# Altium PCB Cold_chain_Logger.PcbDoc (part 1 of 3)
Units mm, origin at the board's own origin, x right, y up, seen from the top; angles counter-clockwise.
Board outline 66 x 99 mm, 4 copper layers (Top Layer, GND Layer, 3.3V layer, Bottom Layer), stack 1.586 mm thick; 118 components, 83 nets, 435 pads, 406 vias.
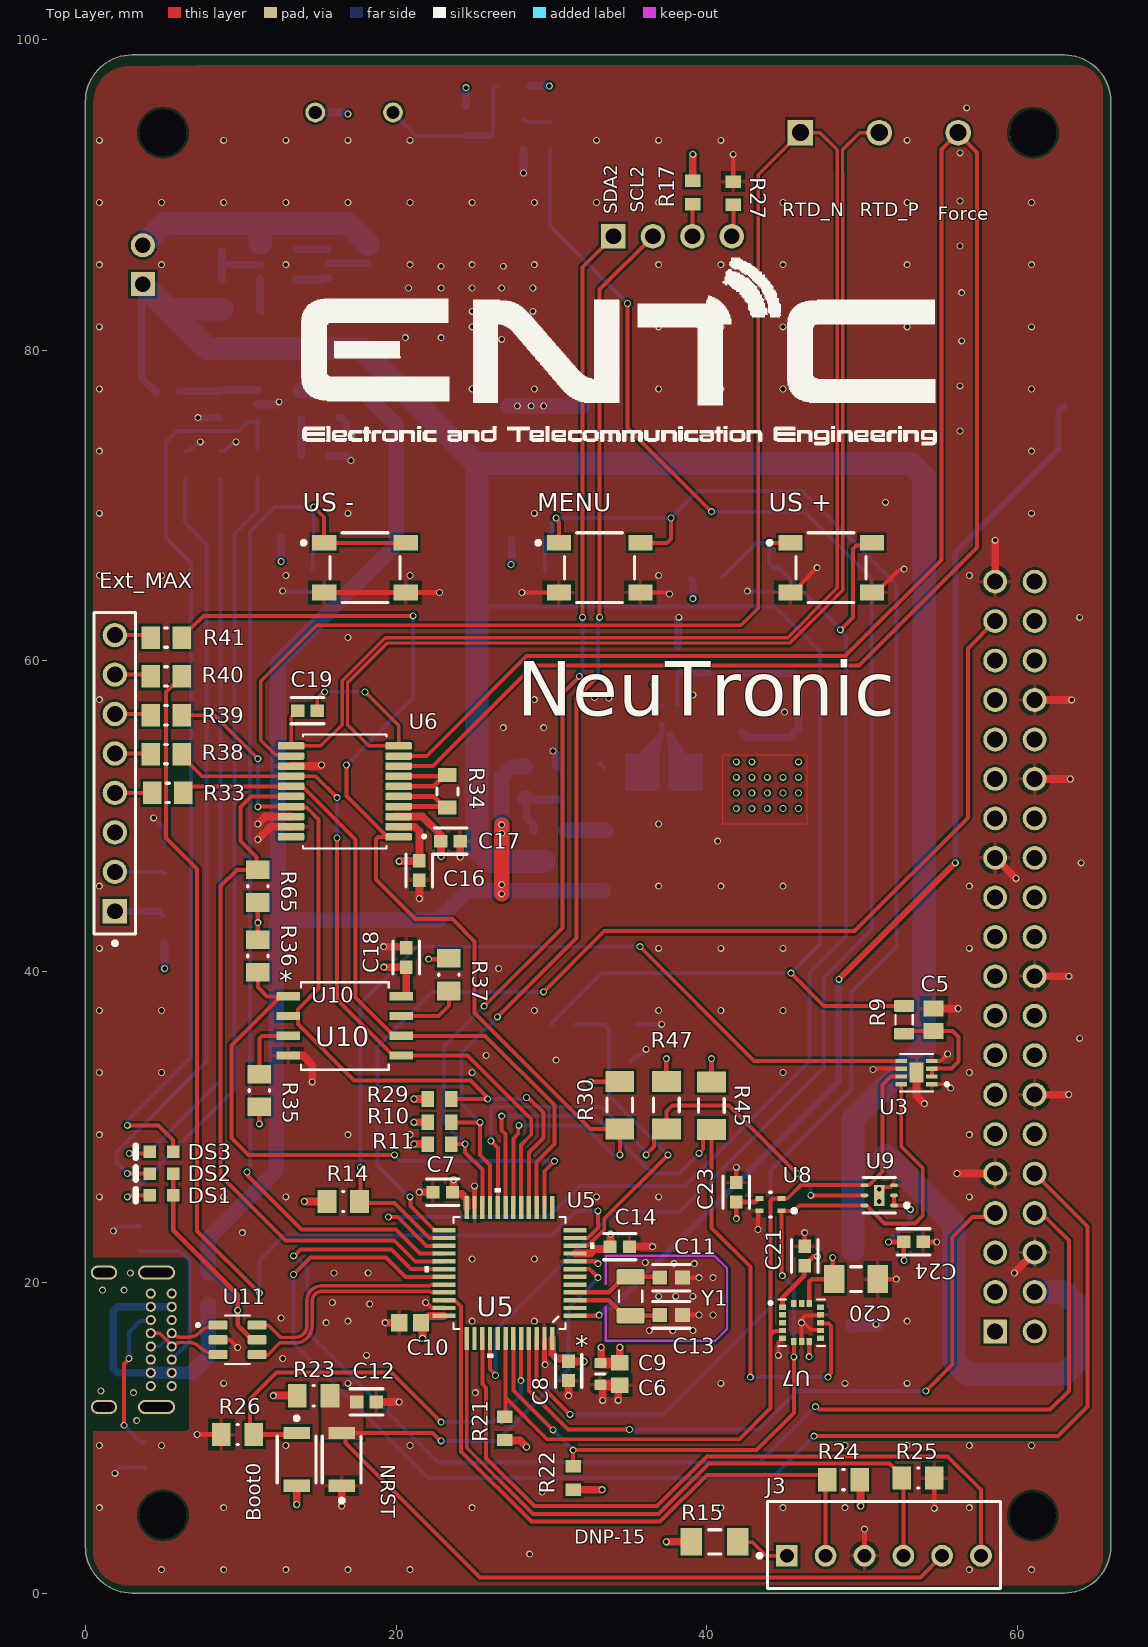
[diagram p0: Top Layer view]
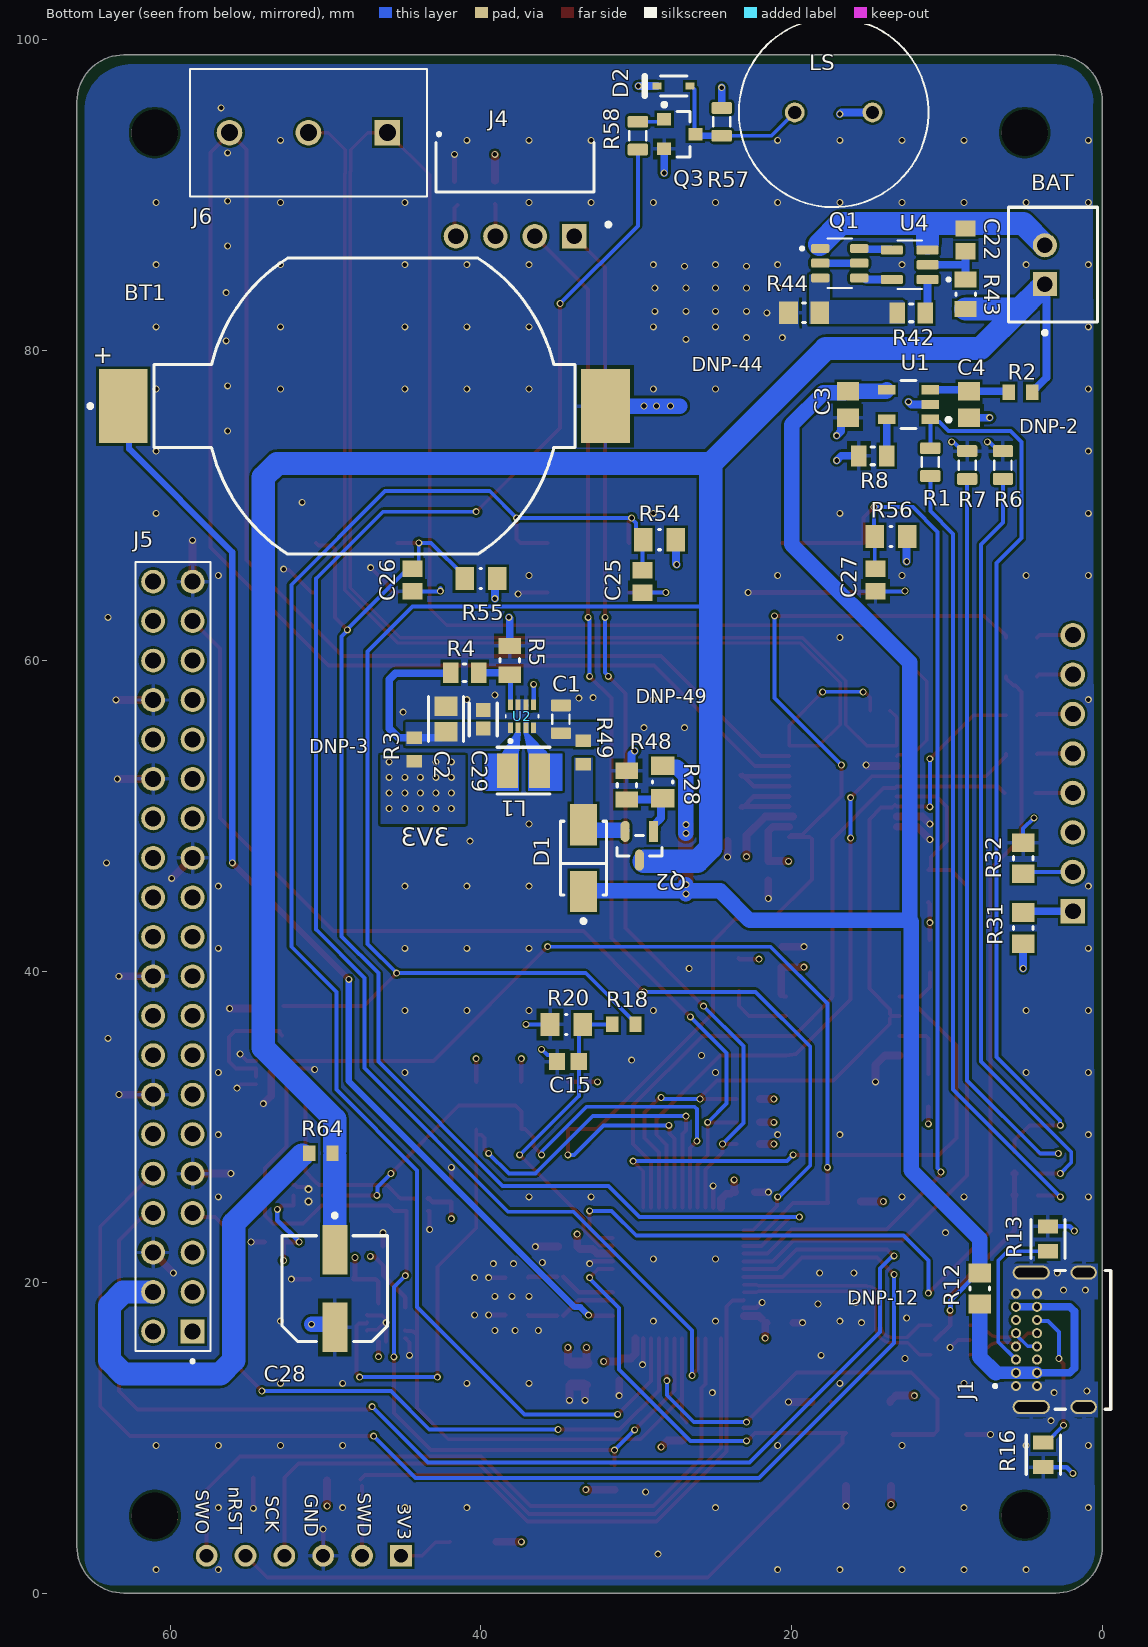
[diagram p1: Bottom Layer view, seen from below]
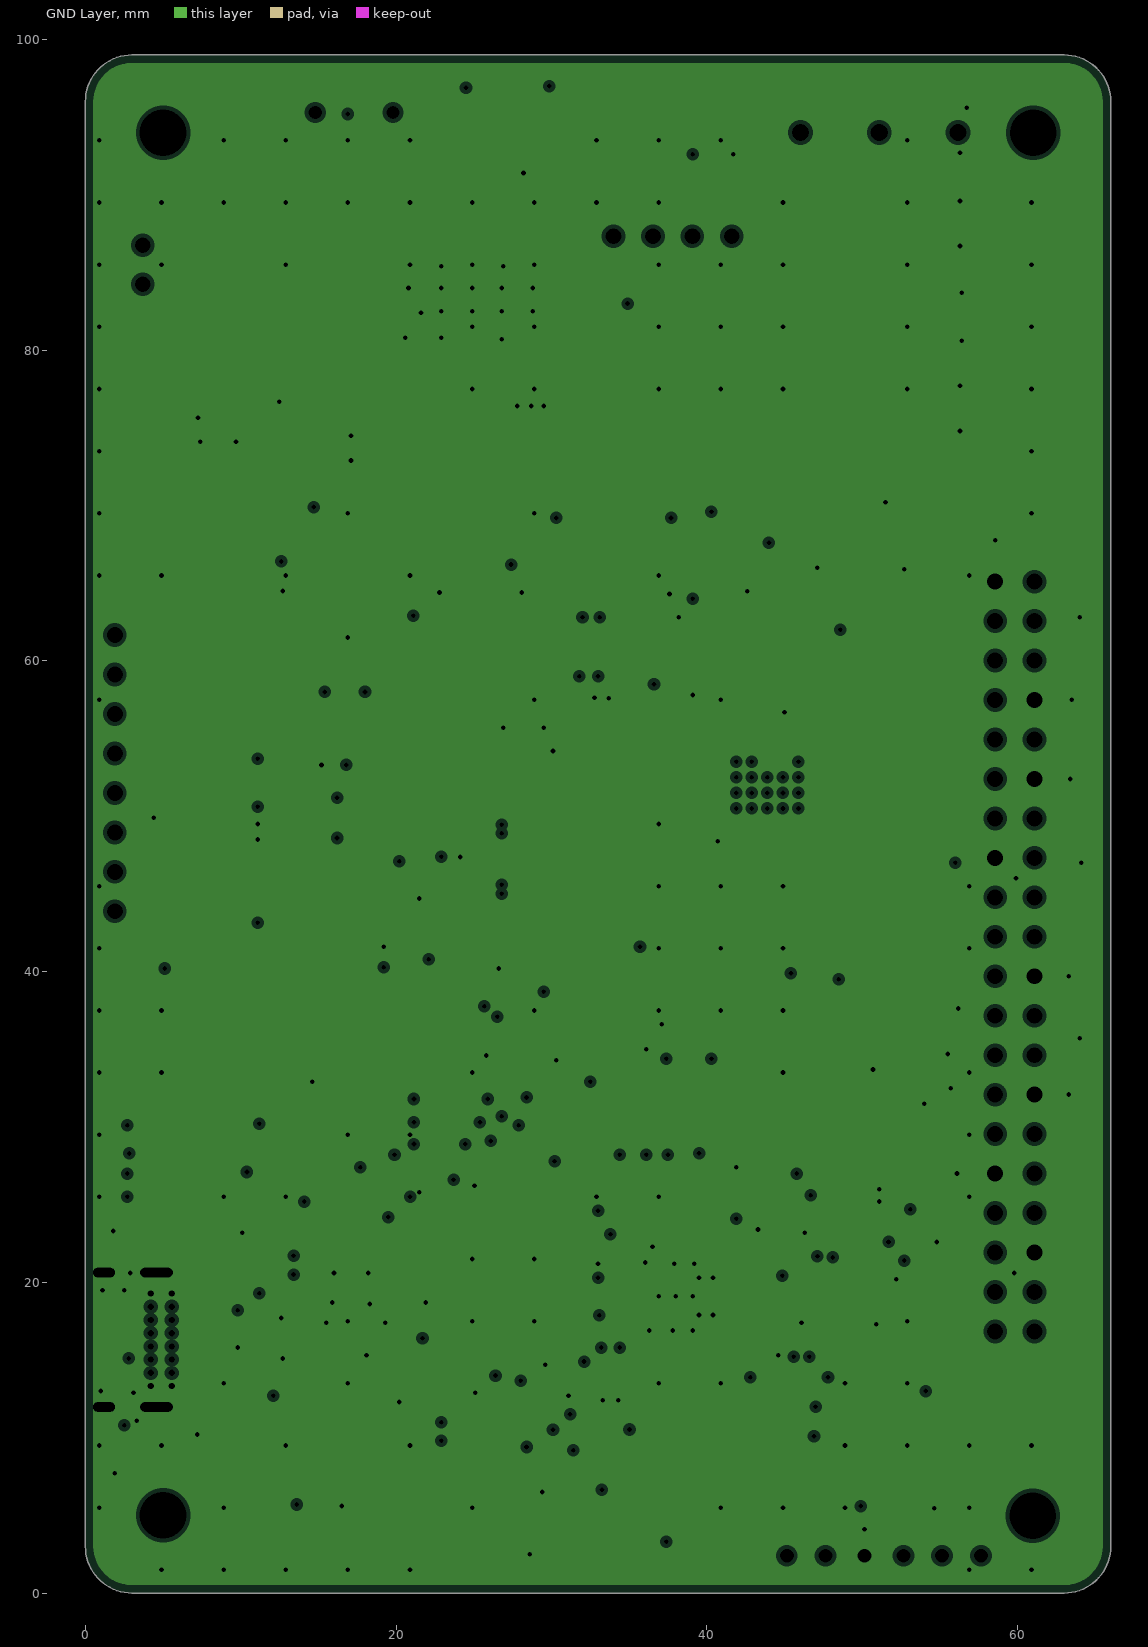
[diagram p2: GND Layer, clearances drawn from the general rule]
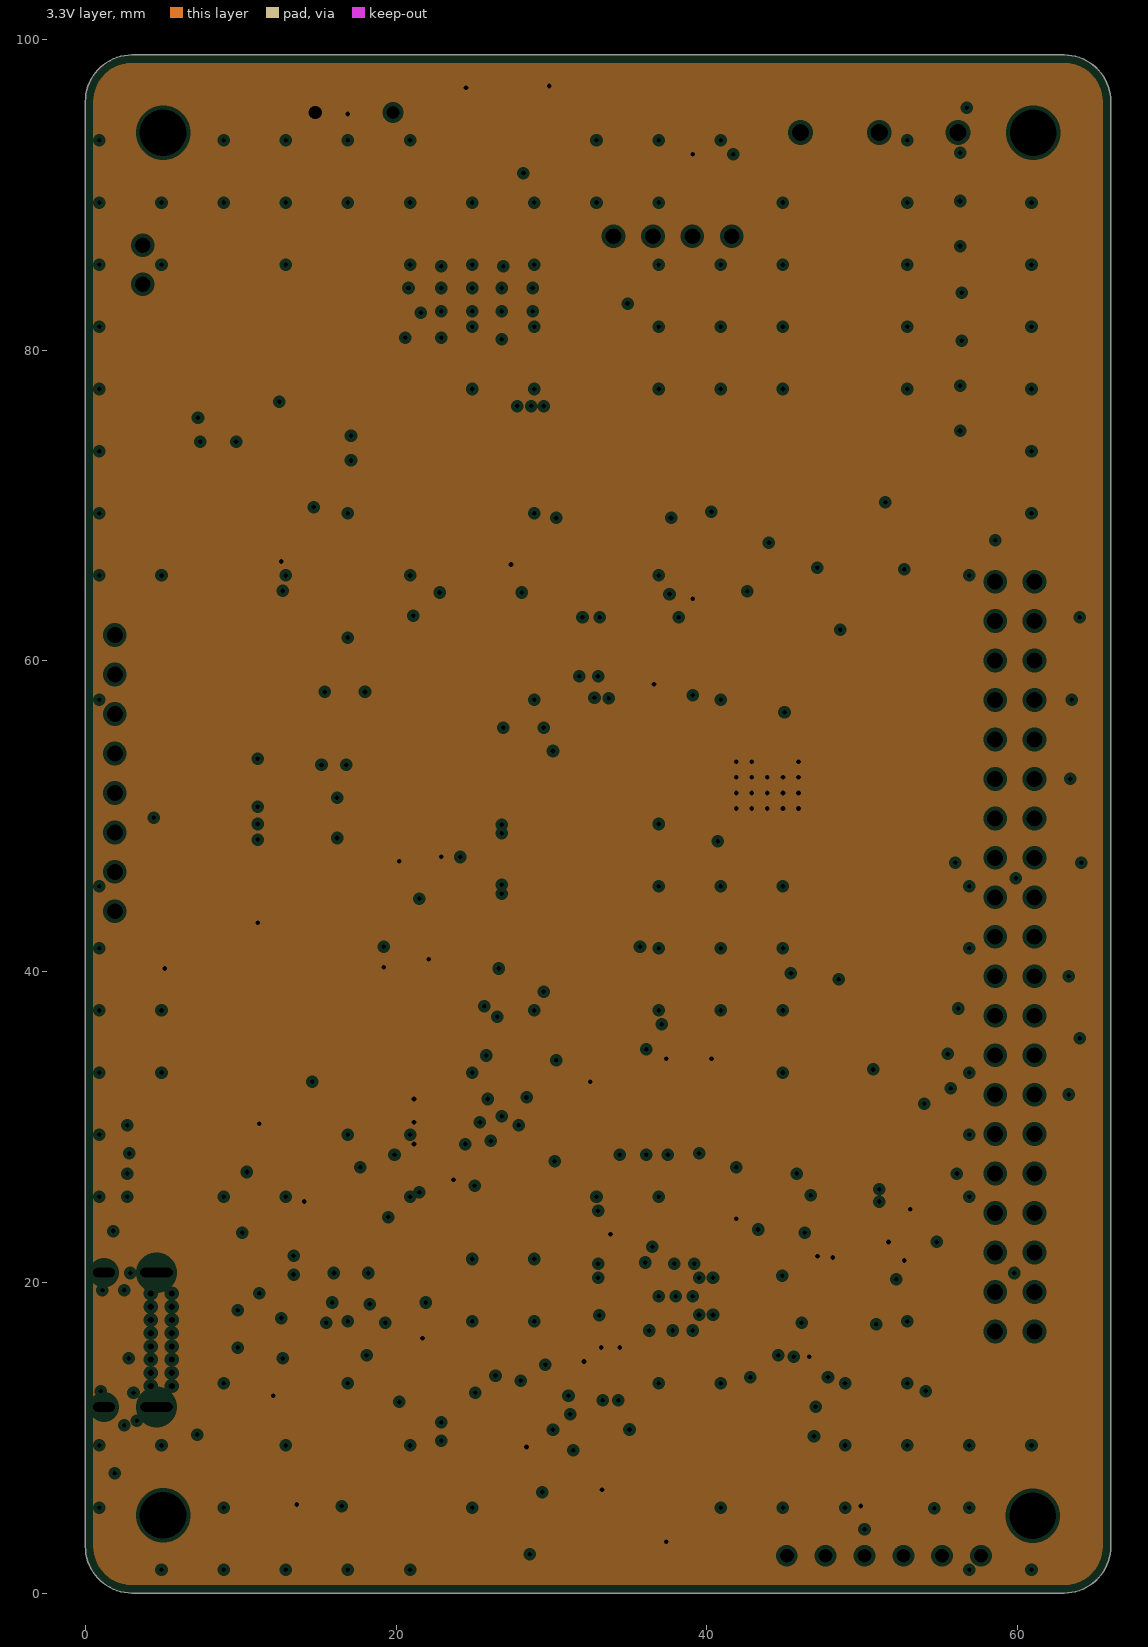
[diagram p3: 3.3V layer, clearances drawn from the general rule]
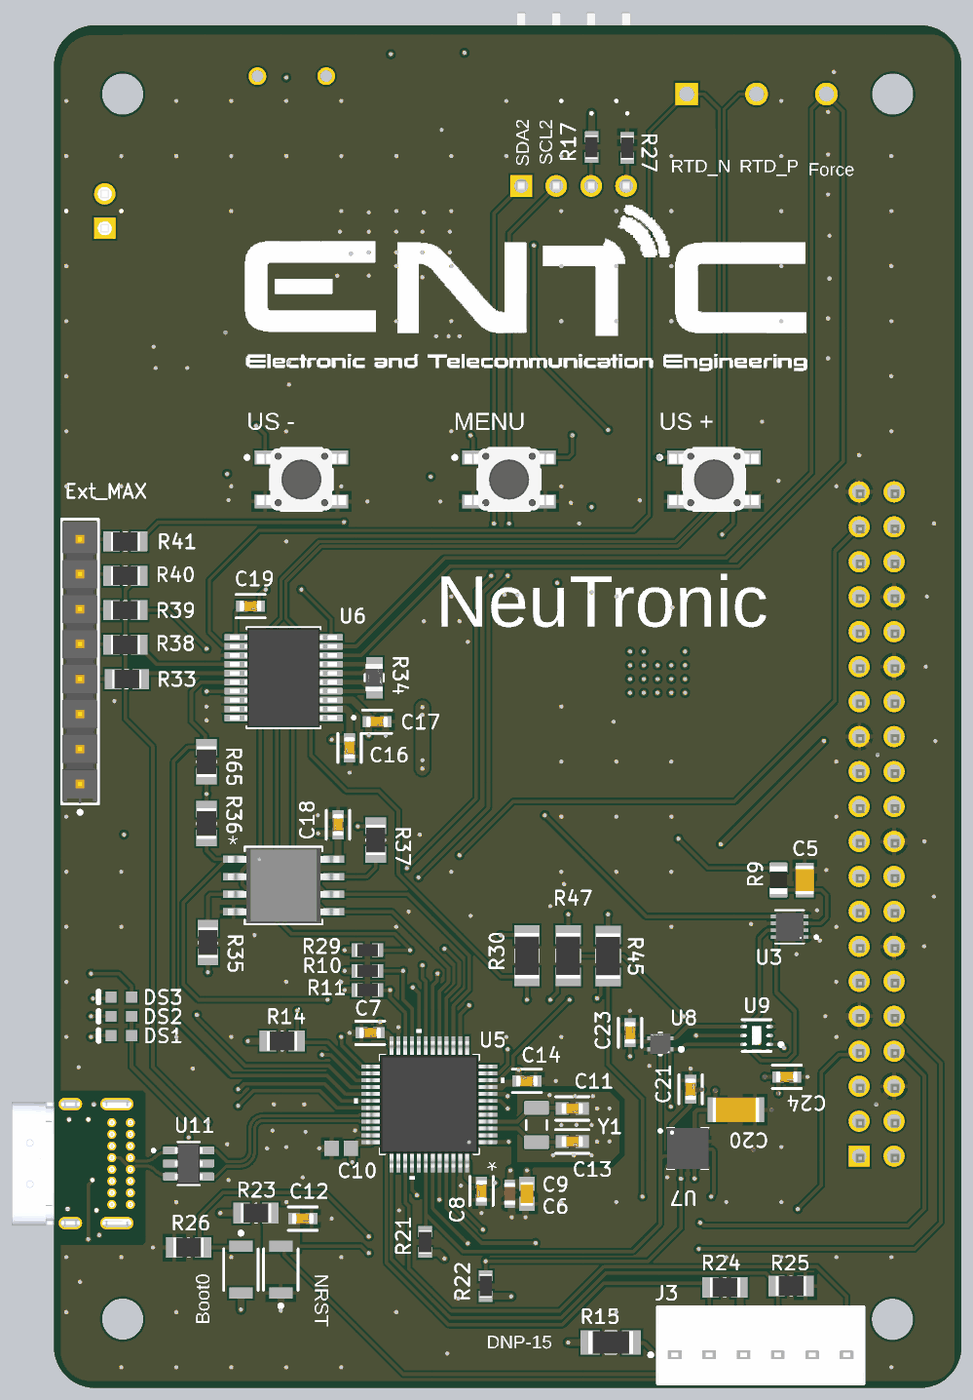
[diagram p5: 3D render of the assembled board from above, using the file's embedded part models]
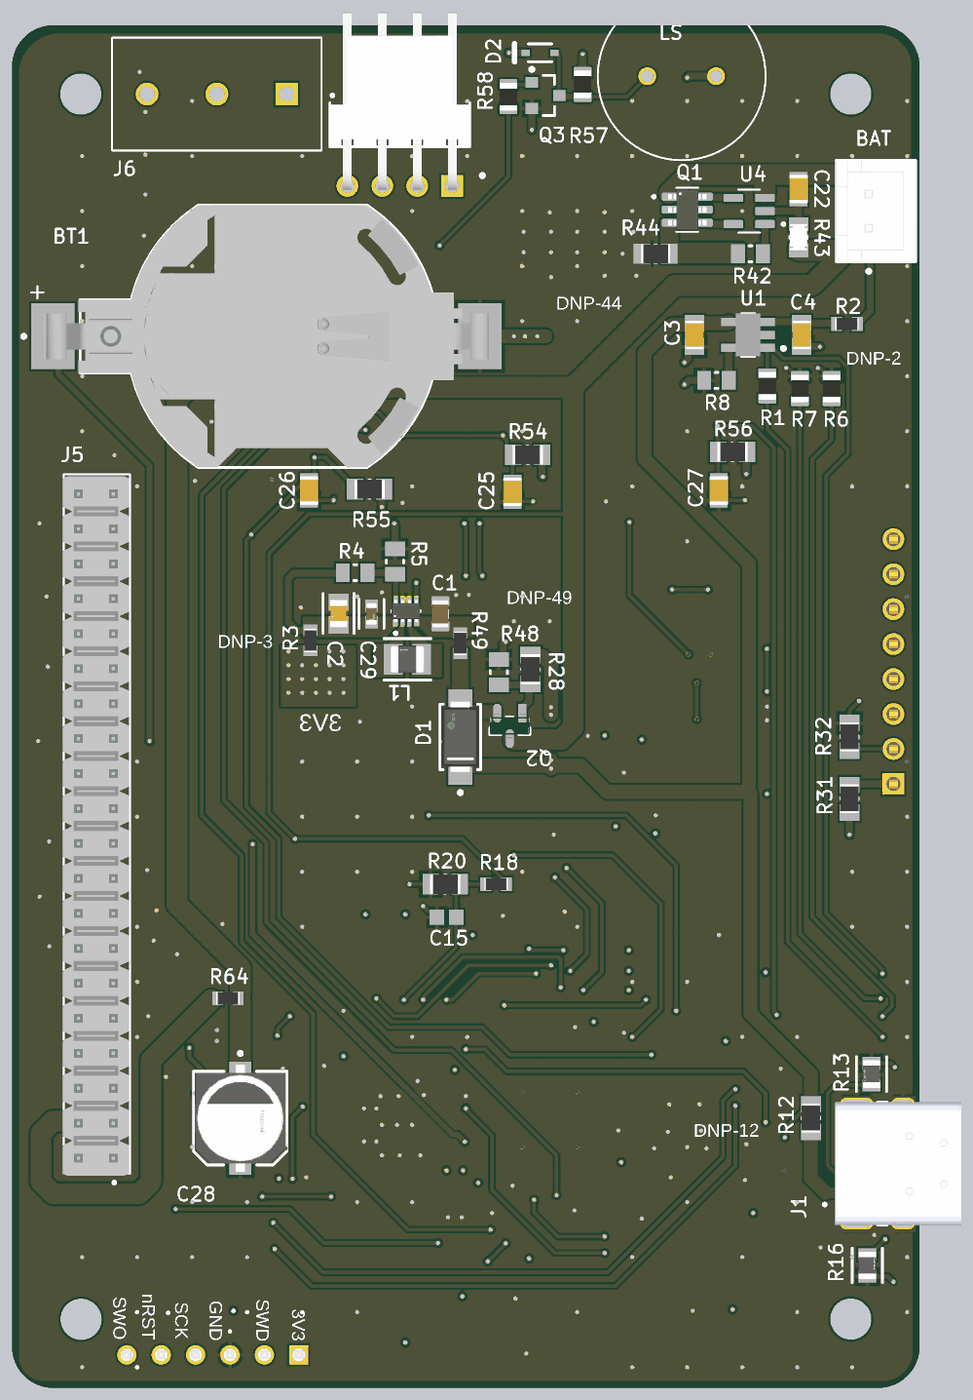
[diagram p6: 3D render of the assembled board from below, using the file's embedded part models]

## Layer stack, top to bottom
Top Solder: solder mask 0.0152, Solder Resist, Dk 3.8
Top Layer: signal copper 0.035
Dielectric 2: prepreg 0.2104, PP-006, Dk 4.4
GND Layer: plane copper 0.0152, net GND
Dielectric 1: dielectric 1.065, FR-4, Dk 4.6
3.3V layer: plane copper 0.0152, net 3.3V
Dielectric 3: prepreg 0.2104, PP-006, Dk 4.4
Bottom Layer: signal copper 0.035
Bottom Solder: solder mask 0.0152, Solder Resist, Dk 3.8

## Board outline
0,3 0,96 cw(c3,96) 3,99 63,99 cw(c63,96) 66,96 66,3 cw(c63,3) 63,0 3,0 cw(c3,3)

## Design rules (kind name [scope] priority, off if disabled: settings)
Clearance Clearance_2 [IsPad AND IsSMTPin vs IsPad AND IsSMTPin] p1: gap=0.15 ignorepadtopadclearanceinfootprint=FALSE
Clearance Clearance_1 [InNamedPolygon('GND_M_B')] p2: gap=0.15 ignorepadtopadclearanceinfootprint=FALSE
Clearance [All] p3: gap=0.1 ignorepadtopadclearanceinfootprint=TRUE except(0.15: SMDPad-SMDPad SMDPad-THPad; 0.2: Arc-Hole Track-Hole Fill-Hole Poly-Hole Region-Hole)
ComponentClearance [InComponent('J1')] p1: gap=0 collisioncheckmode=3 verticalgap=0 showdistances=FALSE
DiffPairsRouting DiffPairsRouting_USB [InDifferentialPairClass('All Differential Pairs')] p1: maxlimit=0.127 minlimit=0.127 mostfreqgap=0.127 toplayer_minwidth=0.222 toplayer_maxwidth=0.222 toplayer_prefwidth=0.222 bottomlayer_minwidth=0.222 bottomlayer_maxwidth=0.222 bottomlayer_prefwidth=0.222 impedanceprofiledriven=TRUE impedanceprofileid={6C2B6216-BE23-4F43-9E8E-8E6D398B4E61} impedanceprofilevalue=90.000000 maxuncoupledlength=12.7
DiffPairsRouting [All] p2: maxlimit=0.254 minlimit=0.254 mostfreqgap=0.254 toplayer_minwidth=0.381 toplayer_maxwidth=0.381 toplayer_prefwidth=0.381 bottomlayer_minwidth=0.381 bottomlayer_maxwidth=0.381 bottomlayer_prefwidth=0.381 maxuncoupledlength=12.7
HoleSize [All] p1: absolutevalues=TRUE maxlimit=4 minlimit=0.025 maxpercent=80.000 minpercent=20.000
HoleToHoleClearance [All] p1: gap=0.2 allowstackedmicrovias=TRUE
MinimumSolderMaskSliver MinimumSolderMaskSliver_U7 [InComponent('U7')] p1: minsoldermaskwidth=0
MinimumSolderMaskSliver MinimumSolderMaskSliver_U2 [InComponent('U2')] p2: minsoldermaskwidth=0
MinimumSolderMaskSliver [All] p3: minsoldermaskwidth=0.15
PlaneClearance THT [IsThruPin] p1: clearance=0.3
PlaneClearance [All] p2: clearance=0.254
PlaneConnect [All] p1: planeconnectstyle=Direct reliefexpansion=0.508 reliefentries=4 reliefconductorwidth=0.254 reliefairgap=0.254
PlaneConnect U2_component [InComponent('U2')] p2: planeconnectstyle=Direct reliefexpansion=0.508 reliefentries=4 reliefconductorwidth=0.254 reliefairgap=0.254
PolygonConnect PolygonConnect_MAIN_GND [IsNamedPolygon('GND_M_B')] p1: thpad.connectstyle=Relief thpad.reliefconductorwidth=0.254 thpad.reliefentries=4 thpad.polygonreliefangle="90 Angle" thpad.airgapwidth=0.254 smdpad.connectstyle=Relief smdpad.reliefconductorwidth=0.254 smdpad.reliefentries=4 smdpad.polygonreliefangle="90 Angle" smdpad.airgapwidth=0.254 via.connectstyle=Direct via.reliefconductorwidth=0.254 via.reliefentries=4 via.polygonreliefangle="90 Angle" via.airgapwidth=0.254
PolygonConnect PolygonVia [IsVia vs IsVia] p2: connectstyle=Direct reliefconductorwidth=0.254 reliefentries=4 polygonreliefangle="90 Angle" airgapwidth=0.254
PolygonConnect PolygonConnect_1 [All] p3: connectstyle=Direct reliefconductorwidth=0.254 reliefentries=4 polygonreliefangle="90 Angle" airgapwidth=0.254
RoutingVias [All] p1: holewidth=0.25 width=0.45 viastyle="Through Hole" minholewidth=0.15 minwidth=0.25 maxholewidth=0.711 maxwidth=1.27
SilkToSilkClearance [All] p1: silktosilkclearance=0.1
SilkToSolderMaskClearance Resister1 [HasFootprint('RESC0805(2012)_L')] p1: minsilkscreentomaskgap=0.135 clearancetoexposedcopper=TRUE
SilkToSolderMaskClearance "Cap 1" [HasFootprint('CAPC0805(2012)145_L')] p2: minsilkscreentomaskgap=0.135 clearancetoexposedcopper=TRUE
SilkToSolderMaskClearance [IsPad] p3: minsilkscreentomaskgap=0.15 clearancetoexposedcopper=TRUE
SolderMaskExpansion "Tented Via" [IsVia] p1: expansion=0 istentingtop=TRUE useseparateexpansions=TRUE expansionbottom=0 istentingbottom=TRUE
SolderMaskExpansion [All] p2: expansion=0 istentingtop=FALSE
SupplyNets "Schematic Supply Nets_6" [InNet('3.3V')] p1: voltage=0.000
SupplyNets "Schematic Supply Nets_5" [InNet('TPS_VIN')] p2: voltage=0.000
SupplyNets "Schematic Supply Nets_3" [InNet('B-')] p3: voltage=0.000
SupplyNets "Schematic Supply Nets_2" [InNet('B+')] p4: voltage=0.000
SupplyNets "Schematic Supply Nets_1" [InNet('5V')] p5: voltage=0.000
SupplyNets "Schematic Supply Nets" [InNet('GND')] p6: voltage=0.000
Width 3.3V [InNet('3.3V')] p1: maxlimit=1.5 minlimit=0.254 preferedwidth=0.3
Width Width_1 [All] p2: maxlimit=2.5 minlimit=0.1 preferedwidth=0.254
21 further rules are at their usual default settings.

## Classes and differential pairs
differential pair class DI: DI
net class DO: USB_DN
net class DI: DI_N DI_P
component class U_Storage: C18 R35 R36 R37 U10
component class U_Sensors: C16 C17 C19 C20 C21 C23 C24 Ext_MAX J6 R30 R31 R32 R33 R34 R38 R39 R40 R41 R45 R47 R65 U6 U7 U8 U9
component class U_Power: BAT C1 C2 C3 C4 C5 C22 C29 D1 DS1 DS2 DS3 J1 L1 Q1 Q2 R1 R2 R3 R4 R5 R6 R7 R8 R9 R12 R13 R14 R16 R28 R42 R43 R44 R48 R49 U1 U2 U3 U4 U11
component class U_Microcontroller: Boot0 BT1 C6 C7 C8 C9 C10 C11 C12 C13 C14 C15 J3 J4 NRST R10 R11 R15 R17 R18 R20 R21 R22 R23 R24 R25 R26 R27 R29 U5 Y1
component class U_IO_Peripherals: C25 C26 C27 D2 LS MENU Q3 R54 R55 R56 R57 R58 "US +" "US -"
component class "U_Cloud Upload": C28 J5 R64
differential pair RTD: +RTD_P -RTD_N
differential pair DI: +DI_P -DI_N

## Components (designator, comment, footprint, x,y, rotation, side; value= is the part's Value field where it differs from the comment)
BAT "B2B-XH-A(LF)(SN)" FP-B2B-XH-A_LF_SN-MFG 3.175,85.5 r90 bottom
Boot0 "B3U-1000P" OMRON-B3U-1000_V 13.6,8.6 r270 top
BT1 "796136-1" TECO-796136-1_V 47.5,76.4 r180 bottom
C1 "Capacitor 22µF +/-40% 16V 0805" CAPC0805(2012)145_L 34.85,56.235 r270 bottom value=22µF
C2 "GRM219R60J476ME44J" FP-GRM219-0_2-0_1-IPC_B 42.25,56.261 r270 bottom value=47µF
C3 "Capacitor 10 uF +/- 10% 16 V 0805" CAPC2013X135X45NL10T25 16.375,76.5 r90 bottom value=10µF
C4 "Capacitor 10 uF +/- 10% 16 V 0805" CAPC2013X135X45NL10T25 8.575,76.5 r90 bottom value=10µF
C5 "Capacitor 100 nF +/-10% 50 V 0805" CAPC2013X95X50LL10T25 54.6,36.9 r270 top value=100nF
C6 "Capacitor 4.7µF +/-20% 10V 0603" CAPC0603(1608)100_L 33.15,14.1 r90 top value=4.7µF
C7 "GCJ188R71C104KA01D" FP-GCJ188-0_2-IPC_C 23,25.8 r0 top value=100nF
C8 "GCJ188R71C104KA01D" FP-GCJ188-0_2-IPC_C 31.1,14.3 r270 top value=100nF
C9 "Capacitor 1uF +/- 10% 16V 0603" CAPC1608X90X35ML15T15 34.4,14.1 r90 top value=1µF
C10 "VJ0603Y103KXQCW1BC" CAPC1608X95X40ML15T15 20.9,17.4 r0 top value=10nF
C11 "GCM1885C2A8R0DA16D" FP-GCM188-0_1-IPC_B 37.7,20.3 r0 top value=8pF
C12 "GCJ188R71C104KA01D" FP-GCJ188-0_2-IPC_C 18.1,12.3 r0 top value=100nF
C13 "GCM1885C2A8R0DA16D" FP-GCM188-0_1-IPC_B 37.7,17.9 r0 top value=8pF
C14 "GCJ188R71C104KA01D" FP-GCJ188-0_2-IPC_C 34.4,22.3 r180 top value=100nF
C15 "VJ0603Y103KXQCW1BC" CAPC1608X95X40ML15T15 34.4,34.2 r180 bottom value=10nF
C16 "GCJ188R71C104KA01D" FP-GCJ188-0_2-IPC_C 21.5,46.5 r270 top value=100nF
C17 "GCJ188R71C104KA01D" FP-GCJ188-0_2-IPC_C 23.5,48.4 r0 top value=100nF
C18 "GCJ188R71C104KA01D" FP-GCJ188-0_2-IPC_C 20.662,40.912 r270 top value=100nF
C19 "GCJ188R71C104KA01D" FP-GCJ188-0_2-IPC_C 14.3,56.8 r0 top locked value=100nF
C20 "Capacitor 10 uF +/- 10% 16 V 1206" CAPC3216X180X50NL20T25 49.6,20.2 r0 top value=10µF
C21 "GCJ188R71C104KA01D" FP-GCJ188-0_2-IPC_C 46.3,21.7 r90 top value=100nF
C22 "Capacitor 100 nF +/-10% 50 V 0805" CAPC2013X95X50LL10T25 8.8,87.1 r270 bottom locked value=100nF
C23 "GCJ188R71C104KA01D" FP-GCJ188-0_2-IPC_C 41.9,25.8 r90 top value=100nF
C24 "GCJ188R71C104KA01D" FP-GCJ188-0_2-IPC_C 53.3,22.6 r0 top value=100nF
C25 "Capacitor 100 nF +/-10% 50 V 0805" CAPC2013X95X50LL10T25 29.6,65.1 r90 bottom value=100nF
C26 "Capacitor 100 nF +/-10% 50 V 0805" CAPC2013X95X50LL10T25 44.4,65.2 r90 bottom value=100nF
C27 "Capacitor 100 nF +/-10% 50 V 0805" CAPC2013X95X50LL10T25 14.6,65.2 r90 bottom value=100nF
C28 "EEEFTE221XAP" FP-FTD8-MFG 49.4,19.6 r270 bottom value=220µF
C29 "GRM188R60J476ME15D" FP-GRM188-0_2-IPC_C 39.85,56.236 r270 bottom value=47µF
D1 "SS14" FP-403AE-MFG 33.4,47.3 r270 bottom
D2 "1N4148WS-7-F" DIOD-SOD323-2-A_V 27.6,97 r0 bottom
DS1 "LTST-C190KRKT" LTST-C191KRKT_V 4.9,25.6 r180 top
DS2 "HSMY-C190" AVAG-HSMX-C190_V 4.9,27 r180 top
DS3 "HSMG-C190" AVAG-HSMX-C190_V 4.9,28.4 r180 top
Ext_MAX "TSW-108-08-G-S" FP-TSW-108-08-G-S-MFG 1.9,52.77 r90 top
J1 "USB4085-GF-A_REVA4" GCT_USB4085-GF-A_REVA4 1.2,16.3 r90 bottom locked
J3 "B6P-SHF-1AA(LF)(SN)" FP-B6P-SHF-1AA_LF_SN-MFG 51.4,3.1 r0 top
J4 "22-05-3041" FP-22-05-3041-MFG 37.8,94.4 r0 bottom
J5 "C9138" AMPHENOL_10129381-940001BLF 59.83,40.97 r90 bottom locked
J6 "282837-3" TE_282837-3 51.1,94 r0 bottom
L1 "DFE252012P-1R0M=P2" FP-DFE252012C-IPC_B 37.25,52.935 r0 bottom value=1µH
LS "PS1240P02BT" XDCR_PS1240P02BT 17.3,95.3 r180 bottom
MENU "PTS647SM38SMTR2LFS" FP-PTS647SM38SMTR2LFS-MFG 33.1,66 r0 top
NRST "B3U-1000P" OMRON-B3U-1000_V 16.5,8.6 r90 top
Q1 "FS8205" SOT95P280X145-6N#1 16.9,85.6 r180 bottom locked
Q2 "DMP1045U-7" FP-SOT23-IPC_B 29.8,48.1 r270 bottom
Q3 "SMMBT2222ALT1G" ONSC-SOT-23-3-318-08_V 27.2,93.9 r180 bottom
R1 "Resistor 470R +/-5% 0805 125 mW" RESC0805(2012)_L 11.075,72.8 r90 bottom value=470
R2 "Resistor 0R +/- 5% 0603 100 mW" RESC1608X55X25ML10T15 5.275,77.3 r180 bottom value=0
R3 "Resistor 0R +/- 5% 0603 100 mW" RESC1608X55X25ML10T15 44.3,54.3 r270 bottom value=0
R4 "RC0805FR-07511KL" RESC2013X60X35NL10T20 41.05,59.235 r0 bottom value=511k
R5 "RK73H2ATTD9102F" RESC2013X60X30NL20T20 38.15,60.035 r270 bottom value=91k
R6 "Resistor 1K +/-5% 0805 125 mW" RESC0805(2012)_L 6.4,72.6 r270 bottom value=1k
R7 "Resistor 470R +/-5% 0805 125 mW" RESC0805(2012)_L 8.7,72.6 r270 bottom value=470
R8 "RT0805FRE072KL" RESC2013X60X35NL10T20 14.775,73.2 r180 bottom value=2k
R9 "Resistor 1K +/-5% 0805 125 mW" RESC0805(2012)_L 52.7,36.9 r90 top value=1k
R10 "Resistor 4k7 +/-1% 0603 100 mW" RESC1608X55X25ML10T15 22.8,30.3 r180 top value=4.7k
R11 "Resistor 4k7 +/-1% 0603 100 mW" RESC1608X55X25ML10T15 22.8,28.9 r180 top value=4.7k
R12 "Resistor 0R +/- 5% 0805 125 mW" RESC2013X60X35ML10T20 7.9,19.6 r90 bottom value=0
R13 "RC2012J512CS" FP-RC2012-IPC_C 3.5,22.8 r270 bottom value=5.1k
R14 "Resistor 10k +/-1% 0805 125 mW" RESC2013X50X35ML15T15 16.6,25.2 r0 top value=10k
R15 "Resistor 0R +/- 0.05% 1206 250 mW" RESC3116X70X50ML13T20 40.5,3.3 r180 top value=0
R16 "RC2012J512CS" FP-RC2012-IPC_C 3.8,8.9 r90 bottom value=5.1k
R17 "Resistor 0R +/- 5% 0603 100 mW" RESC1608X55X25ML10T15 39.1,90.15 r90 top value=0
R18 "Resistor 4k7 +/-1% 0603 100 mW" RESC1608X55X25ML10T15 30.8,36.6 r180 bottom value=4.7k
R20 "Resistor 10k +/-1% 0805 125 mW" RESC2013X50X35ML15T15 34.5,36.6 r180 bottom value=10k
R21 "Resistor 4k7 +/-1% 0603 100 mW" RESC1608X55X25ML10T15 27,10.6 r270 top value=4.7k
R22 "Resistor 4k7 +/-1% 0603 100 mW" RESC1608X55X25ML10T15 31.4,7.4 r270 top value=4.7k
R23 "Resistor 10k +/-1% 0805 125 mW" RESC2013X50X35ML15T15 14.7,12.7 r180 top value=10k
R24 "Resistor 10k +/-1% 0805 125 mW" RESC2013X50X35ML15T15 48.8,7.3 r0 top value=10k
R25 "Resistor 10k +/-1% 0805 125 mW" RESC2013X50X35ML15T15 53.6,7.4 r0 top value=10k
R26 "Resistor 10k +/-1% 0805 125 mW" RESC2013X50X35ML15T15 9.8,10.2 r0 top value=10k
R27 "Resistor 0R +/- 5% 0603 100 mW" RESC1608X55X25ML10T15 41.7,90.1 r90 top value=0
R28 "Resistor 10k +/-1% 0805 125 mW" RESC2013X50X35ML15T15 28.3,52.2 r90 bottom value=10k
R29 "Resistor 4k7 +/-1% 0603 100 mW" RESC1608X55X25ML10T15 22.8,31.8 r180 top value=4.7k
R30 "Resistor 10k +/-1% 1206 250 mW" RESC3216X60X45ML15T20 34.4,31.4 r270 top value=10k
R31 "Resistor 0R +/- 5% 0805 125 mW" RESC2013X60X35ML10T20 5.1,42.8 r270 bottom value=0
R32 "Resistor 0R +/- 5% 0805 125 mW" RESC2013X60X35ML10T20 5.1,47.3 r90 bottom value=0
R33 "Resistor 0R +/- 5% 0805 125 mW" RESC2013X60X35ML10T20 5.3,51.5 r0 top locked value=0
R34 "RT0805BRD07430RL" FP-RT0805-MFG 23.3,51.6 r270 top locked value=430
R35 "Resistor 10k +/-1% 0805 125 mW" RESC2013X50X35ML15T15 11.2,32.35 r270 top value=10k
R36 "Resistor 10k +/-1% 0805 125 mW" RESC2013X50X35ML15T15 11.1,41 r90 top value=10k
R37 "Resistor 10k +/-1% 0805 125 mW" RESC2013X50X35ML15T15 23.4,39.8 r90 top locked value=10k
R38 "Resistor 0R +/- 5% 0805 125 mW" RESC2013X60X35ML10T20 5.2,54 r0 top locked value=0
R39 "Resistor 0R +/- 5% 0805 125 mW" RESC2013X60X35ML10T20 5.2,56.5 r0 top locked value=0
R40 "Resistor 0R +/- 5% 0805 125 mW" RESC2013X60X35ML10T20 5.2,59 r0 top locked value=0
R41 "Resistor 0R +/- 5% 0805 125 mW" RESC2013X60X35ML10T20 5.2,61.5 r0 top locked value=0
R42 "RT0805FRE072KL" RESC2013X60X35NL10T20 12.3,82.4 r0 bottom locked value=2k
R43 "CRCW0805220RJNEA" FP-CRCW0805-e3-IPC_B 8.8,83.6 r90 bottom locked value=220
R44 "Resistor 0R +/- 5% 0805 125 mW" RESC2013X60X35ML10T20 19.2,82.4 r0 bottom value=0
R45 "Resistor 10k +/-1% 1206 250 mW" RESC3216X60X45ML15T20 40.3,31.375 r270 top value=10k
R47 "Resistor 10k +/-1% 1206 250 mW" RESC3216X60X45ML15T20 37.4,31.4 r90 top value=10k
R48 "RK73H2ATTD9102F" RESC2013X60X30NL20T20 30.6,52 r270 bottom value=91k
R49 "Resistor 0R +/- 5% 0603 100 mW" RESC1608X55X25ML10T15 33.4,54.1 r90 bottom value=0
R54 "Resistor 10k +/-1% 0805 125 mW" RESC2013X50X35ML15T15 28.5,67.8 r180 bottom value=10k
R55 "Resistor 10k +/-1% 0805 125 mW" RESC2013X50X35ML15T15 40,65.3 r180 bottom value=10k
R56 "Resistor 10k +/-1% 0805 125 mW" RESC2013X50X35ML15T15 13.6,68 r180 bottom value=10k
R57 "Resistor 1K +/-5% 0805 125 mW" RESC0805(2012)_L 24.5,94.7 r90 bottom value=1k
R58 "Resistor 1K +/-5% 0805 125 mW" RESC0805(2012)_L 29.9,93.8 r270 bottom value=1k
R64 "Resistor 0R +/- 5% 0603 100 mW" RESC1608X55X25ML10T15 50.3,28.3 r180 bottom value=0
R65 "Resistor 10k +/-1% 0805 125 mW" RESC2013X50X35ML15T15 11.1,45.5 r270 top value=10k
U1 "MCP73831T-2DCI/OT" FP-C04-091-OT-MFG 12.475,76.5 r0 bottom
U2 "TPS631000DRLR" SOT50P160X60-8N 37.35,56.435 r90 bottom
U3 "MAX17048G+T10" SON50P200X200X80-9N 53.5,33.5 r180 top locked
U4 "S-8211CAH-M5T1U" S-8211CAH-M5T1U-Footprint-1 12.4,85.5 r0 bottom locked
U5 "STM32L412CBT6" LQFP-48 27.3,20.6 r180 top locked
U6 "MAX31865AAP+" SOP65P777X199-20N 16.7,51.6 r180 top locked
U7 "LIS3DHTR" XDCR_LIS3DHTR 46.1,17.4 r0 top
U8 "SHT45-AD1B-R2" FP-SHT45-AD1B-R2-MFG 44.1,25 r180 top
U9 "OPT3001DNPR" FP-DNP0006A-MFG 51.1,25.6 r180 top
U10 "W25Q128JVSIQ TR" SOIC_208MIL_WIN 16.7,36.5 r0 top
U11 "USBLC6-2SC6" SOT95P280X145-6N#2 9.8,16.3 r0 top
"US +" "PTS647SM38SMTR2LFS" FP-PTS647SM38SMTR2LFS-MFG 48,66 r0 top
"US -" "PTS647SM38SMTR2LFS" FP-PTS647SM38SMTR2LFS-MFG 18,66 r0 top
Y1 "ABS07-166-32.768KHZ-T" EPSON-FC-135_V 35.1,19.1 r90 top

## Footprints (in the part's own frame and the unit in brackets; to place one, negate y for a bottom-side part, rotate by r counter-clockwise, add the part's x,y. Pads: shape width x height; smd on the part's side, far side on the other; paste and mask are expansions set on the pad)
AMPHENOL_10129381-940001BLF [mm]
  rect 1.53x1.53 / inner round 1.53 / far side rect 1.53x1.53 hole 1.02: 01(-24.13,-1.27)
  round 1.53 hole 1.02: 02(-24.13,1.27) 03(-21.59,-1.27) 04(-21.59,1.27) 05(-19.05,-1.27) 06(-19.05,1.27) 07(-16.51,-1.27) 08(-16.51,1.27) 09(-13.97,-1.27) 10(-13.97,1.27) 11(-11.43,-1.27) 12(-11.43,1.27) 13(-8.89,-1.27) 14(-8.89,1.27) 15(-6.35,-1.27) 16(-6.35,1.27) 17(-3.81,-1.27) 18(-3.81,1.27) 19(-1.27,-1.27) 20(-1.27,1.27) 21(1.27,-1.27) 22(1.27,1.27) 23(3.81,-1.27) 24(3.81,1.27) 25(6.35,-1.27) 26(6.35,1.27) 27(8.89,-1.27) 28(8.89,1.27) 29(11.43,-1.27) 30(11.43,1.27) 31(13.97,-1.27) 32(13.97,1.27) 33(16.51,-1.27) 34(16.51,1.27) 35(19.05,-1.27) 36(19.05,1.27) 37(21.59,-1.27) 38(21.59,1.27) 39(24.13,-1.27) 40(24.13,1.27)
  silkscreen extent -26.15,-2.41 25.4,2.41, body extent -25.55,-2.34 25.25,2.48, height 8.18
AVAG-HSMX-C190_V [mm] "SMD, 2-Leads, Body 1.6x0.8mm, Height 0.9mm"
  rect 0.8x0.8 smd: 1(-0.75,0) 2(0.75,0)
  silkscreen extent 1.65,-0.4 1.65,0.4, body extent -0.8,-0.4 0.8,0.4, height 0.9
CAPC0603(1608)100_L [mm] "Chip Capacitor, Body 1.6x0.8mm, Height 1.0mm, IPC High Density"
  rrect25% 0.66x0.76 smd: 1(-0.7,0) 2(0.7,0)
  silkscreen extent 0,-0.3 0,0.3, body extent -0.8,-0.4 0.8,0.4, height 0.95
CAPC0805(2012)145_L [mm] "Chip Capacitor, Body 2.0x1.2mm, Height 1.45mm, IPC High Density"
  rrect25% 0.76x1.3 smd: 1(-0.9,0) 2(0.89,0)
  silkscreen extent -0.3,-0.55 0.3,0.55, body extent -1,-0.6 1,0.6, height 1.45
CAPC1608X90X35ML15T15 [mm] "Chip Capacitor, 2-Leads, Body 1.75x0.95mm, IPC Low Density"
  rect 1x1.1 smd: 1(-0.725,0) 2(0.725,0)
  body extent -0.87,-0.48 0.87,0.48, height 0.9
CAPC1608X95X40ML15T15 [mm] "Chip Capacitor, 2-Leads, Body 1.60x0.80mm, IPC Low Density"
  rect 1.05x1.1 smd: 1(-0.7,0) 2(0.7,0)
  body extent -0.88,-0.48 0.87,0.47, height 0.95
CAPC2013X95X50LL10T25 [mm] "Chip Capacitor, 2-Leads, Body 2.10x1.35mm, IPC High Density"
  rect 1.05x1.3 smd: 1(-0.725,0) 2(0.725,0)
  body extent -1.05,-0.67 1.05,0.67, height 0.95
CAPC2013X135X45NL10T25 [mm] "Chip Capacitor, 2-Leads, Body 2.10x1.35mm, IPC Medium Density"
  rect 1.2x1.4 smd: 1(-0.85,0) 2(0.85,0)
  body extent -1.05,-0.67 1.05,0.67, height 1.35
CAPC3216X180X50NL20T25 [mm] "Chip Capacitor, 2-Leads, Body 3.40x1.80mm, IPC Medium Density"
  rect 1.3x1.8 smd: 1(-1.4,0) 2(1.4,0)
  silkscreen extent -0.35,-0.8 0.35,0.8, body extent -1.7,-0.9 1.7,0.9, height 1.8
DIOD-SOD323-2-A_V [mm] "SOD-323, 2-Leads, Body 1.7x1.3mm"
  rect 0.59x0.45 smd: 1(-1.055,0) 2(1.055,0)
  silkscreen extent -0.85,-0.65 1.85,0.65, body extent -0.85,-0.65 0.85,0.65, height 1.2
EPSON-FC-135_V [mm] "SMD, 2-Leads, Body 3.2x1.5mm"
  rrect20% 1x1.8 smd: 1(-1.25,0) 2(1.25,0)
  silkscreen extent -0.35,-0.75 0.35,0.75, body extent -1.6,-0.75 1.6,0.75, height 0.9
FP-22-05-3041-MFG [mm]
  rect 1.57x1.57 hole 1.02 paste-2539.97 mask+0: 1(-3.81,7.073)
  round 1.57 hole 1.02 paste-2539.97 mask+0: 2(-1.27,7.073) 3(1.27,7.073) 4(3.81,7.073)
  silkscreen extent -6.13,1.03 5.08,6.44, body extent -5,-5.54 5,7.39, height 6.6
FP-403AE-MFG [mm]
  rect 2.65x1.75 smd paste+0 mask+0: 1(-2.15,0) 2(2.15,0)
  silkscreen extent -2.37,-1.48 4.17,1.48, body extent -2.6,-1.36 2.6,1.36, height 2.5
FP-B2B-XH-A_LF_SN-MFG [mm]
  rect 1.55x1.55 hole 1 paste-2539.97 mask+0: 1(-1.25,0.525)
  round 1.55 hole 1 paste-2539.97 mask+0: 2(1.25,0.525)
  silkscreen extent -4.5,-2.88 3.7,2.88, body extent -3.7,-2.88 3.7,2.88, height 7
FP-B6P-SHF-1AA_LF_SN-MFG [mm]
  rect 1.4x1.4 hole 0.9 paste-2539.97 mask+0: 1(-6.25,-0.7)
  round 1.4 hole 0.9 paste-2539.97 mask+0: 2(-3.75,-0.7) 3(-1.25,-0.7) 4(1.25,-0.7) 5(3.75,-0.7) 6(6.25,-0.7)
  silkscreen extent -8.12,-2.8 7.5,2.8, body extent -7.6,-2.9 7.6,2.9, height 0.25
FP-C04-091-OT-MFG [mm]
  rect 1.1x0.6 smd paste+0 mask+0: 1(-1.4,0.95) 2(-1.4,0) 3(-1.4,-0.95) 4(1.4,-0.95) 5(1.4,0.95)
  silkscreen extent -2.7,-1.55 0.48,1.55, body extent -0.9,-1.55 0.9,1.55, height 1.45
FP-CRCW0805-e3-IPC_B [mm]
  rect 1.007x1.408 smd paste+0 mask+0: 1(-0.951,0) 2(0.951,0)
  silkscreen extent -0.07,-0.63 0.07,0.63, body extent -1,-0.63 1,0.63, height 0.5
FP-DFE252012C-IPC_B [mm]
  rect 1.355x2.206 smd paste+0 mask+0: 1(-1.026,0) 2(1.026,0)
  silkscreen extent -1.7,-1.5 1.7,1.5, body extent -1.25,-1 1.25,1, height 1.2
FP-DNP0006A-MFG [mm]
  rrect100% 0.5x0.25 smd paste+0 mask+0: 1(-0.95,0.65) 2(-0.95,0) 3(-0.95,-0.65) 4(0.95,-0.65) 5(0.95,0) 6(0.95,0.65)
  rect 0.65x1.35 smd paste-1000 mask+0: 7(0,0)
  silkscreen extent -1.9,-1.15 1.05,1.15, body extent -1.3,-1.15 1.3,1.15, height 0.25
FP-FTD8-MFG [mm]
  rect 3.2x1.6 smd paste+0 mask+0: 1(-2.5,0) 2(2.5,0)
  silkscreen extent -4.82,-3.4 3.4,3.4, body extent -3.9,-3.3 3.9,3.3, height 6.1
FP-GCJ188-0_2-IPC_C [mm]
  rect 0.855x0.812 smd paste+0 mask+0: 1(-0.625,0) 2(0.625,0)
  silkscreen extent -1.05,-0.85 1.05,0.85, body extent -1.15,-0.55 1.15,0.55, height 0.25
FP-GCM188-0_1-IPC_B [mm]
  rect 0.959x0.912 smd paste+0 mask+0: 1(-0.727,0) 2(0.727,0)
  silkscreen extent -1.21,-0.86 1.21,0.86, body extent -1.46,-0.71 1.46,0.71, height 0.25
FP-GRM188-0_2-IPC_C [mm]
  rect 0.905x0.906 smd paste+0 mask+0: 1(-0.601,0) 2(0.601,0)
  silkscreen extent -1.05,-0.9 1.05,0.9, body extent -0.8,-0.4 0.8,0.4, height 1
FP-GRM219-0_2-0_1-IPC_B [mm]
  rect 1.255x1.456 smd paste+0 mask+0: 1(-0.826,0) 2(0.826,0)
  silkscreen extent -1.45,-1.13 1.45,1.13, body extent -1,-0.63 1,0.63, height 0.95
FP-PTS647SM38SMTR2LFS-MFG [mm]
  rect 1.55x1 smd paste+0 mask+0: 1(-2.625,1.6) 2(2.625,1.6) 3(-2.625,-1.6) 4(2.625,-1.6)
  silkscreen extent -4.07,-2.25 2.25,2.25, body extent -3.5,-2.42 3.5,2.42, height 0.25
FP-RC2012-IPC_C [mm]
  rect 0.905x1.308 smd paste+0 mask+0: 1(-0.801,0) 2(0.801,0)
  silkscreen extent -1.25,-1.1 1.25,1.1, body extent -1,-0.63 1,0.63, height 0.65
FP-RT0805-MFG [mm]
  rect 0.9x1.2 smd paste+0 mask+0: 1(-1.05,0) 2(1.05,0)
  silkscreen extent -0.23,-0.67 0.23,0.67, body extent -1.6,-0.77 1.6,0.77, height 0.25
FP-SHT45-AD1B-R2-MFG [mm]
  rect 0.5x0.3 smd paste+0 mask+0: 1(-0.7,0.4) 2(-0.7,-0.4) 3(0.7,-0.4) 4(0.7,0.4)
  silkscreen extent -1.65,-0.8 0.08,0.8, body extent -1.05,-0.9 1.05,0.9, height 0.25
FP-SOT23-IPC_B [mm]
  rect 1.359x0.587 smd paste+0 mask+0: 1(-0.927,0.915)
  rrect100% 1.359x0.587 smd paste+0 mask+0: 2(-0.927,-0.915) 3(0.927,0)
  silkscreen extent -0.65,-1.45 0.65,1.45, body extent -1.2,-1.46 1.2,1.46, height 1.2
FP-TSW-108-08-G-S-MFG [mm]
  rect 1.57x1.57 hole 1.02 paste-2539.97 mask+0: 1(-8.89,0)
  round 1.57 hole 1.02 paste-2539.97 mask+0: 2(-6.35,0) 3(-3.81,0) 4(-1.27,0) 5(1.27,0) 6(3.81,0) 7(6.35,0) 8(8.89,0)
  silkscreen extent -11.07,-1.34 10.35,1.34, body extent -10.45,-1.44 10.45,1.44, height 0.25
GCT_USB4085-GF-A_REVA4 [mm]
  round 0.65 hole 0.4: A1(-2.975,4.36) A4(-2.125,4.36) A5(-1.275,4.36) A6(-0.425,4.36) A7(0.425,4.36) A8(1.275,4.36) A9(2.125,4.36) A12(2.975,4.36) B1(2.975,3.01) B4(2.125,3.01) B5(1.275,3.01) B6(0.425,3.01) B7(-0.425,3.01) B8(-1.275,3.01) B9(-2.125,3.01) B12(-2.975,3.01)
  oval 0.9x1.7 hole 0.6 slot 1.4 at 90 deg: S1(-4.325,0) S2(4.325,0)
  oval 0.9x2.4 hole 0.6 slot 2.1 at 90 deg: S3(-4.325,3.38) S4(4.325,3.38)
  silkscreen extent -4.47,-1.74 4.47,5.8, body extent -4.47,-4.25 4.47,4.92, height 3.46
LQFP-48 [mil]
  rect 58x11 smd paste+0 mask+0: 1(-166,108.27) 2(-166,88.58) 3(-166,68.9) 4(-166,49.21) 5(-166,29.53) 6(-166,9.84) 7(-166,-9.84) 8(-166,-29.53) 9(-166,-49.21) 10(-166,-68.9) 11(-166,-88.58) 12(-166,-108.27) 25(166,-108.27) 26(166,-88.58) 27(166,-68.9) 28(166,-49.21) 29(166,-29.53) 30(166,-9.84) 31(166,9.84) 32(166,29.53) 33(166,49.21) 34(166,68.9) 35(166,88.58) 36(166,108.27)
  rect 11x58 smd paste+0 mask+0: 13(-108.27,-166) 14(-88.58,-166) 15(-68.9,-166) 16(-49.21,-166) 17(-29.53,-166) 18(-9.84,-166) 19(9.84,-166) 20(29.53,-166) 21(49.21,-166) 22(68.9,-166) 23(88.58,-166) 24(108.27,-166) 37(108.27,166) 38(88.58,166) 39(68.9,166) 40(49.21,166) 41(29.53,166) 42(9.84,166) 43(-9.84,166) 44(-29.53,166) 45(-49.21,166) 46(-68.9,166) 47(-88.58,166) 48(-108.27,166)
  silkscreen extent -215,-215 215,215, body extent -181,-181 181,181, height 63
LTST-C191KRKT_V [mm] "SMD, 2-Leads, Body 1.6x0.8mm"
  rect 0.8x0.8 smd: 1(-0.75,0) 2(0.75,0)
  silkscreen extent 1.65,-0.4 1.65,0.4, body extent -0.8,-0.4 0.8,0.4, height 0.9
OMRON-B3U-1000_V [mm] "SMD, 2-Leads, Body 3x2.5mm"
  rect 0.8x1.7 smd: 1(-1.7,0) 2(1.7,0)
  silkscreen extent -2.77,-1.25 1.5,1.25, body extent -1.5,-1.25 1.5,1.25, height 1.75
ONSC-SOT-23-3-318-08_V [mm] "SOT23, 3-Leads, Body 2.92x1.3mm, Pitch 0.95mm"
  rect 0.9x0.8 smd: 1(-1,0.95) 2(-1,-0.95) 3(1,0)
  silkscreen extent -1.13,-1.46 0.65,2.02, body extent -0.65,-1.46 0.65,1.46, height 1.11
RESC0805(2012)_L [mm] "Chip Resistor, Body 2.0x1.3mm, IPC High Density"
  rrect25% 0.76x1.3 smd: 1(-0.9,0) 2(0.89,0)
  silkscreen extent -0.3,-0.55 0.3,0.55, body extent -1,-0.62 1,0.63, height 0.6
RESC1608X55X25ML10T15 [mm] "Chip Resistor, 2-Leads, Body 1.70x0.90mm, IPC Low Density"
  rect 0.8x1 smd: 1(-0.75,0) 2(0.75,0)
  body extent -0.85,-0.45 0.85,0.45, height 0.55
RESC2013X50X35ML15T15 [mm] "Chip Resistor, 2-Leads, Body 2.2x1.4mm, IPC Low Density"
  rect 1.2x1.5 smd: 1(-1.05,0) 2(1.05,0)
  silkscreen extent -0.05,-0.65 0.05,0.65, body extent -1.1,-0.7 1.1,0.7, height 0.5
RESC2013X60X30NL20T20 [mm] "Chip Resistor, 2-Leads, Body 2.00x1.25mm, IPC Medium Density"
  rect 1.05x1.45 smd: 1(-0.925,0) 2(0.925,0)
  silkscreen extent -0.1,-0.63 0.1,0.63, body extent -1.1,-0.72 1.1,0.72, height 0.6
RESC2013X60X35ML10T20 [mm] "Chip Resistor, 2-Leads, Body 2.1x1.35mm, IPC Low Density"
  rect 1.2x1.45 smd: 1(-1,0) 2(1,0)
  silkscreen extent -0.1,-0.63 0.1,0.63, body extent -1.05,-0.68 1.05,0.67, height 0.6
RESC2013X60X35NL10T20 [mm] "Chip Resistor, 2-Leads, Body 2.00x1.25mm, IPC Medium Density"
  rect 1x1.35 smd: 1(-0.9,0) 2(0.9,0)
  silkscreen extent -0.1,-0.58 0.1,0.58, body extent -1.05,-0.67 1.05,0.67, height 0.6
RESC3116X70X50ML13T20 [mm] "Chip Resistor, 2-Leads, Body 3.25x1.65mm, IPC Low Density"
  rect 1.4x1.75 smd: 1(-1.5,0) 2(1.5,0)
  silkscreen extent -0.4,-0.77 0.4,0.77, body extent -1.63,-0.82 1.63,0.82, height 0.7
RESC3216X60X45ML15T20 [mm] "Chip Resistor, 2-Leads, Body 3.3x1.75mm, IPC Low Density"
  rect 1.35x1.85 smd: 1(-1.525,0) 2(1.525,0)
  silkscreen extent -0.45,-0.82 0.45,0.82, body extent -1.65,-0.87 1.65,0.87, height 0.6
S-8211CAH-M5T1U-Footprint-1 [mm]
  rrect25% 1.41x0.59 smd: 1(-1.15,0.95) 2(-1.15,0) 3(-1.15,-0.95) 4(1.15,-0.95) 5(1.15,0.95)
  silkscreen extent -2.6,-1.57 0.8,1.57
SOIC_208MIL_WIN [mil]
  rect 59.56x20.97 smd paste+0 mask+0: 1(-143.5,75) 2(-143.5,25) 3(-143.5,-25) 4(-143.5,-75) 5(143.5,-75) 6(143.5,-25) 7(143.5,25) 8(143.5,75)
  silkscreen extent -111,-111 111,111, body extent -159,-106 159,106, height 85
SON50P200X200X80-9N [mm]
  rrect25% 0.76x0.27 smd: 1(-0.985,0.75) 2(-0.985,0.25) 3(-0.985,-0.25) 4(-0.985,-0.75) 5(0.985,-0.75) 6(0.985,-0.25) 7(0.985,0.25) 8(0.985,0.75)
  rect 0.9x1.3 smd paste-2: 9(0,0)
  silkscreen extent -2.04,-1.2 1.05,1.2, body extent -1,-1 1,1, height 0.8
SOP65P777X199-20N [mm]
  rrect25% 1.7x0.48 smd: 1(-3.46,2.925) 2(-3.46,2.275) 3(-3.46,1.625) 4(-3.46,0.975) 5(-3.46,0.325) 6(-3.46,-0.325) 7(-3.46,-0.975) 8(-3.46,-1.625) 9(-3.46,-2.275) 10(-3.46,-2.925) 11(3.46,-2.925) 12(3.46,-2.275) 13(3.46,-1.625) 14(3.46,-0.975) 15(3.46,-0.325) 16(3.46,0.325) 17(3.46,0.975) 18(3.46,1.625) 19(3.46,2.275) 20(3.46,2.925)
  silkscreen extent -5.2,-3.67 2.69,3.67, body extent -3.89,-3.6 3.89,3.6, height 1.99
SOT50P160X60-8N [mm]
  rect 0.66x0.32 smd mask+0.05: 1(-0.735,0.75) 2(-0.735,0.25) 3(-0.735,-0.25) 4(-0.735,-0.75) 5(0.735,-0.75) 6(0.735,-0.25) 7(0.735,0.25) 8(0.735,0.75)
  silkscreen extent -1.7,-1.05 0.09,1.05, body extent -0.8,-1.05 0.8,1.05, height 0.6
SOT95P280X145-6N#1 [mm]
  rrect50% 1.21x0.59 smd: 1(-1.255,0.95) 2(-1.255,0) 3(-1.255,-0.95) 4(1.255,-0.95) 5(1.255,0) 6(1.255,0.95)
  silkscreen extent -2.53,-1.6 0.8,1.6, body extent -1.4,-1.45 1.4,1.45, height 1.45
SOT95P280X145-6N#2 [mm]
  rrect25% 1.21x0.59 smd: 1(-1.255,0.95) 2(-1.255,0) 3(-1.255,-0.95) 5(1.255,-0.95) 5(1.255,0) 6(1.255,0.95)
  silkscreen extent -2.65,-1.57 0.81,1.57, body extent -1.4,-1.46 1.4,1.46, height 0.4
TE_282837-3 [mm]
  rect 1.65x1.65 hole 1.1: 1(-5.08,0)
  round 1.65 hole 1.1: 2(0,0) 3(5.08,0)
  silkscreen extent -8.5,-4.1 7.62,4.1
TECO-796136-1_V [mm] "SMD, 2-Leads, Body 32.31x19.05mm"
  rect 3.15x4.78 smd: 1(-15.52,0) 2(15.52,0)
  silkscreen extent -17.77,-9.52 13.54,9.53, body extent -16.16,-9.53 16.17,9.52, height 6.52
XDCR_LIS3DHTR [mm]
  rect 0.45x0.35 smd paste-1 mask+0: 1(-1.225,1) 2(-1.225,0.5) 3(-1.225,0) 4(-1.225,-0.5) 5(-1.225,-1) 9(1.225,-1) 10(1.225,-0.5) 11(1.225,0) 12(1.225,0.5) 13(1.225,1)
  rect 0.35x0.45 smd paste-1 mask+0: 6(-0.5,-1.225) 7(0,-1.225) 8(0.5,-1.225) 14(0.5,1.225) 15(0,1.225) 16(-0.5,1.225)
  silkscreen extent -2.1,-1.5 1.5,1.5, body extent -1.5,-1.5 1.5,1.5, height 1
XDCR_PS1240P02BT [mm]
  round 1.28 hole 0.85: 1(-2.5,0) 2(2.5,0)
  silkscreen extent -6.1,-6.1 6.1,6.1

## Part data
BAT: library part CMP-002-00073-1, "CONNECTOR HEADER, XH SERIES, 2 POSITION, 2.50MM, Press-Fit Solder, Detent Lock, Natural", Max Current Rating=3A, Max Operating Temperature=85°C, Min Operating Temperature=-25°C, Voltage Rating=250V, Connector Type="Male Pin", Manufacturer Part Number 1=B2B-XH-A(LF)(SN), Mounting Technology="Through Hole", Pins=2
Boot0 NRST: library part CMP-011-00000-2, "Tactile Switch, SPST-NO, 0.05 A, 12 V, -25 to 70 degC, 2-Pin SMD, RoHS, Tape and Reel", Case/Package=B3U-1000, Contact Current Rating=50mA, IP Rating=IP40, Manufacturer="Omron Electronic Components", Max Contact Resistance=100mohm, Max Operating Temperature=70°C, Max Voltage Rating (DC)=12V, Min Operating Temperature=-25°C, Operating Force=153gf, Package Description="2-Pin Surface Mount Device, Body 3 x 2.5 mm", Package Quantity=3500, Resistance=0.1Ohm, Contact Material=Silver, Current Rating=50mA, Datasheet URL=http://www.omron.com/ecb/products/pdf/en-b3u.pdf, Datasheet Version=Jan-15, Manufacturer URL=http://www.omron.com/, Max Current Rating=50mA, Mounting Technology=SM, Package Reference=B3U-1000, Packaging=TapeandReel, RoHS Compliant=True, Throw Configuration=SPST, Voltage Rating=12V, Voltage Rating (DC)=12V
BT1: library part CMP-002-00002-2, "Battery Connector, 1 Cell, CR2032, 2-Pin SMD, RoHS, Tape and Reel", Colour=Black, Manufacturer="TE Connectivity", Max Voltage Rating (AC)=30V, Package Description="2-Pin Surface Mount Device, Body 32.31 x 19.05 mm", Package Quantity=400, Batteries=1, Case/Package=796136-1, Connector Type=BatteryHolder, Contact Material=Bronze, Contact Plating=Tin, Datasheet URL=http://www.te.com/commerce/DocumentDelivery/DDEController?Action=srchrtrv&DocNm=796136&DocType=Customer+Drawing&DocLang=English&DocFormat=pdf&PartCntxt=796136-1, Datasheet Version=Dec-13, Manufacturer URL=http://www.te.com/, Mounting Technology=SM, Package Reference=796136-1, Packaging=TapeandReel, Pins=2, RoHS Compliant=True
C1: library part CMP-001-00081-4, "Chip Capacitor, 22µF +/-40%, 16V, 0805, Thickness 1.45 mm", Case/Package=0805, LCSC ID=C162295, Max Operating Temperature=85°C, Min Operating Temperature=-55°C, Tolerance=5%, Voltage Rating=16V, Mounting Technology=SMT, Pins=2
C2: library part CMP-001-00086-1, "Ceramic Capacitor, Multilayer, Ceramic, 6.3V, 20% +Tol, 20% -Tol, X5R, 15% TC, 47uF, Surface Mount, 2012M/0805", Case/Package=0805, Max Operating Temperature=85°C, Min Operating Temperature=-55°C, Tolerance=20%, Voltage Rating=6.3V, Mounting Technology="Surface Mount"
C3: library part CMP-001-00015-6, "Chip Capacitor, 10 uF, +/- 10%, 16 V, 0805 (2012 Metric)", Capacitor Type=Ceramic, Case/Package=0805, LCSC ID=C77075, Max Operating Temperature=85°C, Min Operating Temperature=-55°C, Tolerance=10%, Voltage Rating=16V, Mounting Technology=SM, Pins=2, RoHS Compliant=True
C4: library part CMP-001-00015-6, "Chip Capacitor, 10 uF, +/- 10%, 16 V, 0805 (2012 Metric)", Capacitor Type=Ceramic, Case/Package=0805, Max Operating Temperature=85°C, Min Operating Temperature=-55°C, Tolerance=10%, Voltage Rating=16V, Mounting Technology=SM, Pins=2, RoHS Compliant=True
C5 C22 C25 C26 C27: library part CMP-001-00018-6, "Chip Capacitor, 100 nF, +/- 10%, 50 V, 0805 (2012 Metric)", Capacitor Type=Ceramic, Case/Package=0805, Max Operating Temperature=125°C, Min Operating Temperature=-55°C, Tolerance=10%, Voltage Rating=50V, Mounting Technology=SM, Pins=2, RoHS Compliant=True
C6: library part CMP-001-00076-4, "Chip Capacitor, 4.7µF +/-20%, 10V, 0603, Thickness 1 mm", Case/Package=0603, Max Operating Temperature=85°C, Min Operating Temperature=-55°C, Tolerance=10%, Voltage Rating=10V, Mounting Technology=SMT, Pins=2
C7 C8 C12 C14 C16 C17 C18 C19 C21 C23 C24: library part CMP-001-00083-1, "16V 100nF X7R ±10% 0603 Multilayer Ceramic Capacitors MLCC - SMD/SMT ROHS", Case/Package=0603, Max Operating Temperature=125°C, Min Operating Temperature=-55°C, Tolerance=10%, Voltage Rating=16V, Mounting Technology="Surface Mount"
C9: library part CMP-001-00004-6, "Chip Capacitor, 1 uF, +/- 10%, 16 V, 0603 (1608 Metric)", Capacitor Type=Ceramic, Case/Package=0603, Max Operating Temperature=125°C, Min Operating Temperature=-55°C, Tolerance=10%, Voltage Rating=16V, Mounting Technology=SM, Pins=2, RoHS Compliant=True
C10 C15: library part CMP-001-00085-1, "Ceramic Capacitor, Multilayer, Ceramic, 10V, 10% +Tol, 10% -Tol, X7R, 15% TC, 0.01uF, Surface Mount, 0603", Case/Package=0603, Max Operating Temperature=125°C, Min Operating Temperature=-55°C, Tolerance=10%, Mounting Technology="Surface Mount"
C11 C13: library part CMP-001-00087-1, "100V 8pF C0G 0603 Multilayer Ceramic Capacitors MLCC - SMD/SMT ROHS", Case/Package=0603, Max Operating Temperature=125°C, Min Operating Temperature=-55°C, Voltage Rating=100V, Mounting Technology="Surface Mount"
C20: library part CMP-001-00016-6, "Chip Capacitor, 10 uF, +/- 10%, 16 V, 1206 (3216 Metric)", Capacitor Type=Ceramic, Case/Package=1206, Max Operating Temperature=125°C, Min Operating Temperature=-55°C, Tolerance=10%, Voltage Rating=16V, Mounting Technology=SM, Pins=2, RoHS Compliant=True
C28: library part CMP-001-00089-1, "Radial Can - SMD ALUMINUM ELECTROLYTIC CAPACITOR FT 25V 220muF 卤20% 0.248Dia 6.30mm", Case/Package=Radial, Max Operating Temperature=105°C, Min Operating Temperature=-55°C, Ripple Current=600mA, Tolerance=20%, Voltage Rating=25V, Mounting Technology="Surface Mount", Ripple Current (AC)=600mA
C29: library part CMP-001-00088-1, "6.3V 47uF X5R ±20% 0603 Multilayer Ceramic Capacitors MLCC - SMD/SMT ROHS", Case/Package=0603, Max Operating Temperature=85°C, Min Operating Temperature=-55°C, Tolerance=20%, Voltage Rating=6.3V, Mounting Technology="Surface Mount"
D1: library part CMP-004-00032-1, "SS14 Series 500 mV 1 A 40 V Max Reverse Voltage Schottky Rectifier - DO-214AC", Case/Package=SMA, Forward Current=1A, Forward Voltage=500mV, Max Operating Temperature=125°C, Min Operating Temperature=-65°C, Mounting Technology="Surface Mount", Pins=2
D2: library part CMP-004-00034-1, "Rectifier Diode Small Signal Switching 75V 0.3A 4ns 2-Pin SOD-323 T/R", Forward Voltage=715mV, Max Operating Temperature=150°C, Max Surge Current=2A, Min Operating Temperature=-65°C, Mounting Technology="Surface Mount", Pins=2
DS1: library part CMP-007-00024-2, "LED Uni-Color Red, 62.5 mW, 25 mA, -30 to 85 degC, 2-Pin SMD, RoHS, Tape and Reel", Case/Package=0603, Colour=Red, Forward Current=20mA, Forward Voltage=2V, Manufacturer=Lite-On, Max Operating Temperature=85°C, Min Operating Temperature=-55°C, Package Description="2-Pin Surface Mount Device, Body 1.6 x 0.8 mm", Package Quantity=3000, Package Reference=C191KRKT, Power=75mW, Datasheet URL=http://optoelectronics.liteon.com/upload/download/DS-22-99-0151/S_110_LTST-C190KRKT.pdf, Datasheet Version="Rev. F, 05/2013", Illumination Colour=Red, Lens Style=Diffused, Luminous Intensity=54mcd, Manufacturer URL=http://www.us.liteon.com/, Mounting Technology=SM, Nominal Vf=2V, Packaging=TapeandReel, Pins=2, RoHS Compliant=True, Viewing Angle=130degrees
DS2: library part CMP-007-00017-2, "LED Uni-Color Yellow, 65 mW, 20 mA, -40 to 85 degC, 2-Pin SMD, RoHS, Tape and Reel", Case/Package=0603, Colour=Yellow, Forward Current=20mA, Forward Voltage=2.1V, Manufacturer=Avago, Max Operating Temperature=85°C, Min Operating Temperature=-40°C, Package Description="2-Pin Surface Mount Device, Body 1.6 x 0.8 mm, Height 0.9 mm", Package Quantity=4000, Package Reference=HSMX-C190, Power=52mW, Datasheet URL=http://docs.avagotech.com/docs/AV02-0551EN, Datasheet Version=Mar-12, Illumination Colour=Yellow, Lens Style=Diffused, Luminous Intensity=8mcd, Manufacturer URL=http://www.avagotech.com/, Mounting Technology=SM, Nominal Vf=2.1V, Packaging=TapeandReel, Pins=2, RoHS Compliant=True, Viewing Angle=170degrees
DS3: library part CMP-007-00013-2, "LED Uni-Color Green, 52 mW, 20 mA, -40 to 85 degC, 2-Pin SMD, RoHS, Tape and Reel", Case/Package=0603, Colour=Green, Forward Current=20mA, Forward Voltage=2.2V, Manufacturer=Avago, Max Operating Temperature=85°C, Min Operating Temperature=-40°C, Package Description="2-Pin Surface Mount Device, Body 1.6 x 0.8 mm, Height 0.9 mm", Package Quantity=4000, Package Reference=HSMX-C190, Power=52mW, Datasheet URL=http://docs.avagotech.com/docs/AV02-0551EN, Datasheet Version=Mar-12, Illumination Colour=Green, Lens Style=Diffused, Luminous Intensity=15mcd, Manufacturer URL=http://www.avagotech.com/, Mounting Technology=SM, Nominal Vf=2.2V, Packaging=TapeandReel, Pins=2, RoHS Compliant=True, Viewing Angle=170degrees
Ext_MAX: library part CMP-02766-000001-1, "CONN HEADER VERT 8POS 2.54MM", Manufacturer=Samtec, Temperature="-55°C to +125°C", Temperature Range High=+125°C, Temperature Range Low=-55°C, Automotive=No, Category=Conn, ComponentLink2Description=Datasheet, ComponentLink2URL=http://suddendocs.samtec.com/catalog_english/tsw_th.pdf, Conn Gender=Male, Conn Orientation=Straight, Contact Material=Gold,Nickel, Device Class L1=Connectors, Device Class L2="Headers and Wire Housings", Device Class L3=unset, Digikey Description="CONN HEADER VERT 8POS 2.54MM", Footprint Url=http://suddendocs.samtec.com/prints/tsw-xxx-xx-x-x-xx-xxx-footprint.pdf, Height=8.71mm, Lead Free=Yes, Manufacturer Part Number=TSW-108-08-G-S, Mouser Description="TSW - Samtec 2.54mm Pin Header 13.46mm Overall Pin Length 5.08mm Tail", Number Of Contacts=8, Number Of Rows=1, Octopart=https://octopart.com/tsw-108-08-g-s-samtec-272653, Package=TSW-108-08-G-S, Pitch=2.54mm, RoHS=TRUE
J1: library part CMP-002-00071-1, "USB-C (USB TYPE-C) USB 2.0 Receptacle Connector 24 (16+8 Dummy) Position Through Hole, Right Angle, low cost, 3.46mm profile, 16 pin, horizontal, Top mount", Case/Package=None, Availability="In Stock", Check_prices=https://www.snapeda.com/parts/USB4085-GF-A/Global+Connector+Technology/view-part/?ref=eda, Component Type=Standard, Design Item ID=USB4085-GF-A_REVA4, Manufacturer Part Number 1=USB4085-GF-A_REVA4, MF="Global Connector Technology", MP=USB4085-GF-A, Pins=20, Price=None, Purchase-URL=https://pricing.snapeda.com/search/part/USB4085-GF-A/?ref=eda, SnapEDA_Link=https://www.snapeda.com/parts/USB4085-GF-A/Global+Connector+Technology/view-part/?ref=snap, Source=USB4085-GF-A_REVA4.SchLib
J3: library part CMP-002-00077-1, "Connector Header, NH Series, 6 Position, Top Entry, 2.5mm, 250V, 30-22 AWG, Natural", Max Operating Temperature=85°C, Min Operating Temperature=-25°C, Voltage Rating=250V, Connector Type="Male Pin", Gender=Male, Mounting Technology="Through Hole"
J4: library part CMP-002-00081-1, "KK 254 Solid Header, Right-Angle, with Friction Lock, 4 Circuits, Tin (Sn) Plating", Max Current Rating=4A, Max Operating Temperature=80°C, Min Operating Temperature=-40°C, Voltage Rating=500V, Gender=Male, Mounting Technology="Through Hole", Pins=4
J5: library part CMP-002-00076-1, Case/Package=None, Manufacturer Part Number 1=10129381-940001BLF, Availability=Unavailable, Component Type=Standard, Design Item ID=10129381-940001BLF, Manufacturer Part Search=C9138, MF="Amphenol ICC (FCI)", MP=10129381-940001BLF, Pins=40, Price=None, Source=10129381-940001BLF.SchLib
J6: library part CMP-002-00083-1, "TERMI-BLOK PCB MOUNT 3P", Case/Package=None, Availability=Unavailable, Component Type=Standard, Design Item ID=282837-3, Manufacturer Part Number 1=282837-3, MP=282837-3, Pins=3, Price=None, Source=282837-3.SchLib
L1: library part CMP-006-00021-1, "Inductor Power Shielded Wirewound 1uH 20% 1MHz Metal Alloy 3.2A 0.042Ohm DCR 1008 T/R", Case/Package=1008, Current Rating=3.2A, Manufacturer Part Number 1=DFE252012P-1R0M=P2, Max Operating Temperature=125°C, Min Operating Temperature=-40°C, Tolerance=20%, Max Current Rating=3.2A, Mounting Technology="Surface Mount"
LS: library part CMP-025-000000-1, "Buzzers Transducer, Externally Driven Piezo 3V 4kHz 60dB @ 3V, 10cm Through Hole PC Pins", Package="2020 TDK", Availability=Unavailable, Component Type=Standard, Design Item ID=PS1240P02BT, Manufacturer Part Number 1=PS1240P02BT, MF=TDK, MP=PS1240P02BT, Pin Count=2, Price=None, SnapEDA_Link=https://www.snapeda.com/parts/PS1240P02BT/TDK/view-part/53420/?ref=snap, Source=SnapEDAsch.SchLib
MENU "US +" "US -": library part CMP-011-00014-1, "Switch Tactile OFF Mom SPST Round Button Gull Wing 50mA 12VDC 100000Cycles 1.77N Surface Mount T/R", Max Current Rating=50mA, Max Operating Temperature=70°C, Min Operating Temperature=-40°C, Mounting Technology="Surface Mount", Throw Configuration=SPST
Q1: library part CMP-019-00049-1, "ÐœÐžÐŸ-Ñ‚Ñ€Ð°Ð½Ð·Ð¸ÑÑ‚Ð¾Ñ€ Ñ Ð´Ð²Ð¾Ð¹Ð½Ñ‹Ð¼ N-ÐºÐ°Ð½Ð°Ð»ÑŒÐ½Ñ‹Ð¼ Ñ€ÐµÐ¶Ð¸Ð¼Ð¾Ð¼ ÑƒÑÐ¸Ð»ÐµÐ½Ð¸Ñ Ð¼Ð¾Ñ‰Ð½Ð¾ÑÑ‚Ð¸", Case/Package=Package, Check_prices=https://www.snapeda.com/parts/FS8205/Fortune+Semiconductor/view-part/?ref=eda, Component Type=Standard, Design Item ID=FS8205, Manufacturer Part Number 1=FS8205, MF="Fortune Semiconductor", MP=FS8205, Pins=6, SnapEDA_Link=https://www.snapeda.com/parts/FS8205/Fortune+Semiconductor/view-part/?ref=snap, Source=FS8205.SchLib
Q2: library part CMP-019-00050-1, "P-Channel 12 V 31 mOhm Surface Mount Enhancement Mode Mosfet - SOT-23-3", Case/Package=SOT-23-3, Max Operating Temperature=150°C, Max Power Dissipation=1.3W, Min Operating Temperature=-55°C, Mounting Technology="Surface Mount", Pins=3
Q3: library part CMP-1048-00591-1, "General Purpose Transistor, NPN Silicon, 3-Pin SOT-23, Pb-Free, Tape and Reel", Manufacturer="On Semiconductor", ComponentLink1Description="Manufacturer URL", ComponentLink1URL=http://www.onsemi.com/, ComponentLink2Description=Datasheet, ComponentLink2URL=http://www.onsemi.cn/pub_link/Collateral/MMBT2222LT1-D.PDF, ComponentLink3Description="Package Specification", ComponentLink3URL=http://www.onsemi.cn/pub_link/Collateral/318-08.PDF, DatasheetVersion="Rev. 10", fT Min (MHz)=300, IC Continuous (A)=0.6, Mounting Technology="Surface Mount", PackageDescription="3-Pin Small Outline Transistor, Body 2.92 x 1.3 mm, Pitch 0.95 mm", PackageReference=SOT-23-3-318-08, PackageVersion="Rev. AP, 11/2009", Packing="Tape and Reel", PartNumber=SMMBT2222ALT1G, Polarity=NPN, RoHS=TRUE
R1: library part CMP-009-00122-3, "Chip Resistor, 470 Ohms, +/-5%, 125 mW, -55 to 155 degC, 0805", Case/Package=0805, Max Operating Temperature=155°C, Min Operating Temperature=-55°C, Power=125mW, Tolerance=5%, Pins=2
R2 R3 R17 R27 R49 R64: library part CMP-009-00006-5, "Chip Resistor, 0 Ohm, 0.1 W, -55 to 155 degC, 0603 (1608 Metric)", Case/Package=0603, Max Operating Temperature=155°C, Min Operating Temperature=-55°C, Power=100mW, Tolerance=5%, Voltage Rating=50V, Mounting Technology=SM, Pins=2, RoHS Compliant=True
R4: library part CMP-009-00177-1, "Res Thick Film 0805 511K Ohm 1% 0.125W(1/8W) ±100ppm/C Pad SMD T/R", Case/Package=0805, LCSC ID=C137511, Max Operating Temperature=155°C, Min Operating Temperature=-55°C, Tolerance=1%, Voltage Rating=150V, Mounting Technology="Surface Mount"
R5 R48: library part CMP-009-00181-1, "Res Thick Film 0805 91K Ohm 1% 0.25W(1/4W) ±100ppm/C Pad SMD T/R Automotive AEC-Q200", Case/Package=0805, LCSC ID=C317292, Max Operating Temperature=155°C, Min Operating Temperature=-55°C, Tolerance=1%, Voltage Rating=150V, Mounting Technology="Surface Mount", Pins=2
R6: library part CMP-009-00118-3, "Chip Resistor, 1 kOhms, +/-5%, 125 mW, -55 to 155 degC, 0805", Case/Package=0805, LCSC ID=C100046, Max Operating Temperature=155°C, Min Operating Temperature=-55°C, Power=125mW, Tolerance=5%, Pins=2
R7: library part CMP-009-00122-3, "Chip Resistor, 470 Ohms, +/-5%, 125 mW, -55 to 155 degC, 0805", Case/Package=0805, LCSC ID=C2073861, Max Operating Temperature=155°C, Min Operating Temperature=-55°C, Power=125mW, Tolerance=5%, Pins=2
R8 R42: library part CMP-009-00183-1, "125mW Thin Film Resistor 150V ±50ppm/℃ ±1% 2kΩ 0805 Chip Resistor - Surface Mount ROHS", Case/Package=0805, Max Operating Temperature=155°C, Min Operating Temperature=-55°C, Tolerance=1%, Voltage Rating=150V, Mounting Technology="Surface Mount"
R9 R57 R58: library part CMP-009-00118-3, "Chip Resistor, 1 kOhms, +/-5%, 125 mW, -55 to 155 degC, 0805", Case/Package=0805, Max Operating Temperature=155°C, Min Operating Temperature=-55°C, Power=125mW, Tolerance=5%, Pins=2
R10 R11 R18 R21 R22 R29: library part CMP-009-00031-5, "Chip Resistor, 4.7 KOhm, +/- 1%, 0.1 W, -55 to 155 degC, 0603 (1608 Metric)", Case/Package=0603, Max Operating Temperature=155°C, Min Operating Temperature=-55°C, Power=100mW, Tolerance=1%, Mounting Technology=SM, Pins=2, RoHS Compliant=True
R12 R31 R32 R33 R38 R39 R40 R41 R44: library part CMP-009-00007-5, "Chip Resistor, 0 Ohm, 0.125 W, -55 to 155 degC, 0805 (2012 Metric)", Case/Package=0805, Max Operating Temperature=155°C, Min Operating Temperature=-55°C, Power=125mW, Tolerance=5%, Voltage Rating=50V, Mounting Technology=SM, Pins=2, RoHS Compliant=True
R13 R16: library part CMP-009-00184-1, "Res Thick Film 0805 5.1K Ohm 5% 0.125W(1/8W) ±100ppm/C Pad SMD T/R", Case/Package=0805, Max Operating Temperature=155°C, Min Operating Temperature=-55°C, Tolerance=5%, Voltage Rating=150V, Mounting Technology="Surface Mount"
R14 R20 R23 R24 R25 R26 R28 R35 R36 R37 R54 R55 R56 R65: library part CMP-009-00018-5, "Chip Resistor, 10 KOhm, +/- 1%, 125 mW, -55 to 155 degC, 0805 (2012 Metric)", Case/Package=0805, Max Operating Temperature=155°C, Min Operating Temperature=-55°C, Power=125mW, Tolerance=1%, Voltage Rating=150V, Mounting Technology=SM, Pins=2, RoHS Compliant=True
R15: library part CMP-009-00008-5, "Chip Resistor, 0 Ohm, 0.25 W, -55 to 155 degC, 1206 (3216 Metric)", Case/Package=1206, Max Operating Temperature=155°C, Min Operating Temperature=-55°C, Power=250mW, Tolerance=0.05%, Voltage Rating=200V, Mounting Technology=SM, Pins=2, RoHS Compliant=True
R30 R45 R47: library part CMP-009-00016-5, "Chip Resistor, 10 KOhm, +/- 1%, 0.25 W, -55 to 155 degC, 1206 (3216 Metric)", Case/Package=1206, Max Operating Temperature=155°C, Min Operating Temperature=-55°C, Power=250mW, Tolerance=1%, Voltage Rating=200V, Mounting Technology=SM, Pins=2, RoHS Compliant=True
R34: library part CMP-009-00179-1, "125mW Thin Film Resistor ±25ppm/℃ ±0.1% 430Ω 0805 Chip Resistor - Surface Mount ROHS", Case/Package=0805, Max Operating Temperature=155°C, Min Operating Temperature=-55°C, Tolerance=0.1%, Voltage Rating=150V, Mounting Technology="Surface Mount"
R43: library part CMP-009-00178-1, "Fixed Resistor, Metal Glaze/Thick Film, 0.125W, 220ohm, 150V, 5% +/-Tol, Surface Mount, 0805", Case/Package=0805, Max Operating Temperature=155°C, Min Operating Temperature=-55°C, Tolerance=5%, Voltage Rating=150V, Mounting Technology="Surface Mount", Pins=2
U1: library part CMP-019-00053-1, "Linear Battery Charger Controller Li-Ion/Li-Pol 505mA 4.2V 5-Pin SOT-23 T/R", Case/Package=SOT-23-5, Max Operating Temperature=85°C, Max Supply Voltage=6V, Min Operating Temperature=-40°C, Min Supply Voltage=3.75V, Output Current=500mA, Output Voltage=4.2V, Mounting Technology="Surface Mount", Pins=5
U2: library part CMP-003-000000-1, "1.5-A output current, high-power-density buck-boost converter", LCSC ID=C5219190, Package="SOT-583 Texas Instruments", Check_prices=https://www.snapeda.com/parts/TPS631000DRLR/Texas+Instruments/view-part/?ref=eda, Component Type=Standard, Design Item ID=TPS631000DRLR, Manufacturer Part Number 1=TPS631000DRLR, MF="Texas Instruments", MP=TPS631000DRLR, Pin Count=8, SnapEDA_Link=https://www.snapeda.com/parts/TPS631000DRLR/Texas+Instruments/view-part/?ref=snap, Source=TPS631000DRLR.SchLib
U3: library part CMP-019-00054-1, "3ÂµA 1-Cell/2-Cell Fuel Gauge with ModelGauge", Case/Package="TDFN-8 Maxim", Availability="In Stock", Check_prices=https://www.snapeda.com/parts/MAX17048G+T10/Analog+Devices/view-part/?ref=eda, Component Type=Standard, Design Item ID=MAX17048G+T10, Manufacturer Part Number 1=MAX17048G+T10, MF="Analog Devices", MP=MAX17048G+T10, Pins=9, Price=None, Purchase-URL=https://pricing.snapeda.com/search/part/MAX17048G+T10/?ref=eda, SnapEDA_Link=https://www.snapeda.com/parts/MAX17048G+T10/Analog+Devices/view-part/?ref=snap, Source=MAX17048G+T10.SchLib
U4: library part CMP-019-00055-1, "Battery Protector Li-Ion/Li-Pol Over Charge/Over Discharge/Over Current 1-Cell Pack 5-Pin SOT-23 T/R", Case/Package=LSSOP, Max Operating Temperature=85°C, Max Supply Voltage=8V, Min Operating Temperature=-40°C, Min Supply Voltage=1.5V
U5: "Ultra-low-power with FPU Arm Cortex-M4 MCU 80 MHz with 128 Kbytes of Flash memory, USB", Manufacturer_Name=STMicroelectronics, Copyright="Copyright (C) 2026 Ultra Librarian. All rights reserved.", Manufacturer Part Number 1=STM32L412CBT6, Manufacturer_Part_Number=STM32L412CBT6, RefDes=RefDes, Type=Type
U6: "RTD-to-Digital Converter", Manufacturer_Name="Analog Devices Inc", Copyright="Copyright (C) 2025 Ultra Librarian. All rights reserved.", Manufacturer Part Number=MAX31865AAP+, Manufacturer Part Number 1=MAX31865AAP+, RefDes=RefDes, Type=Type